# EAGLE board SparkFun_PIR_Breakout-Panel (EAGLE 9.6.0), part 1 of 3
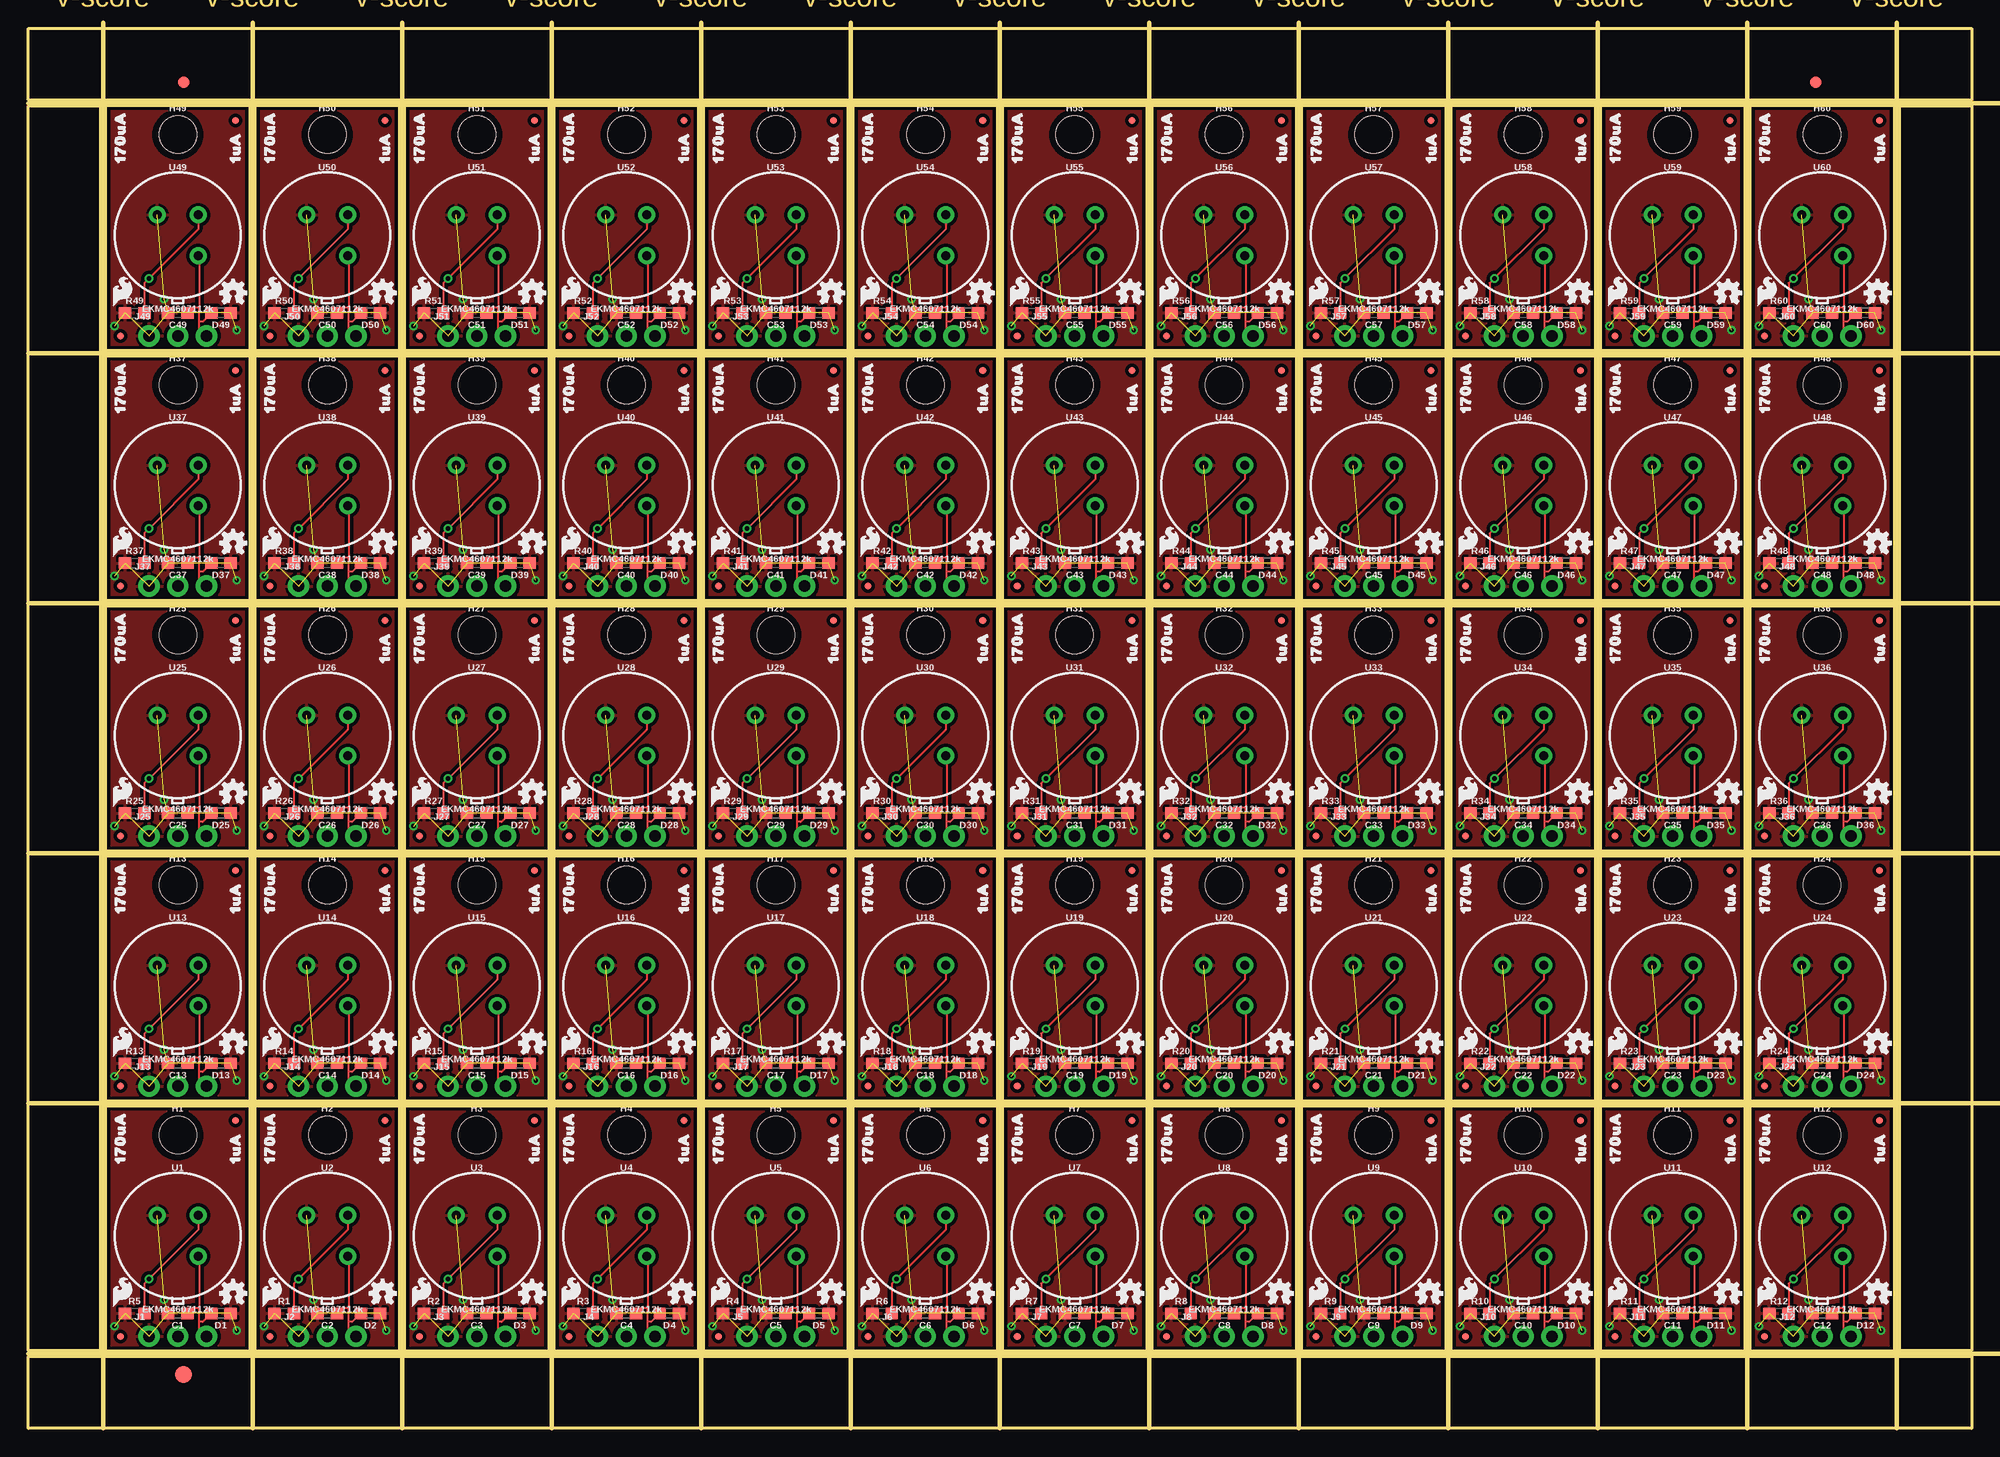
[diagram p0: board, top side]
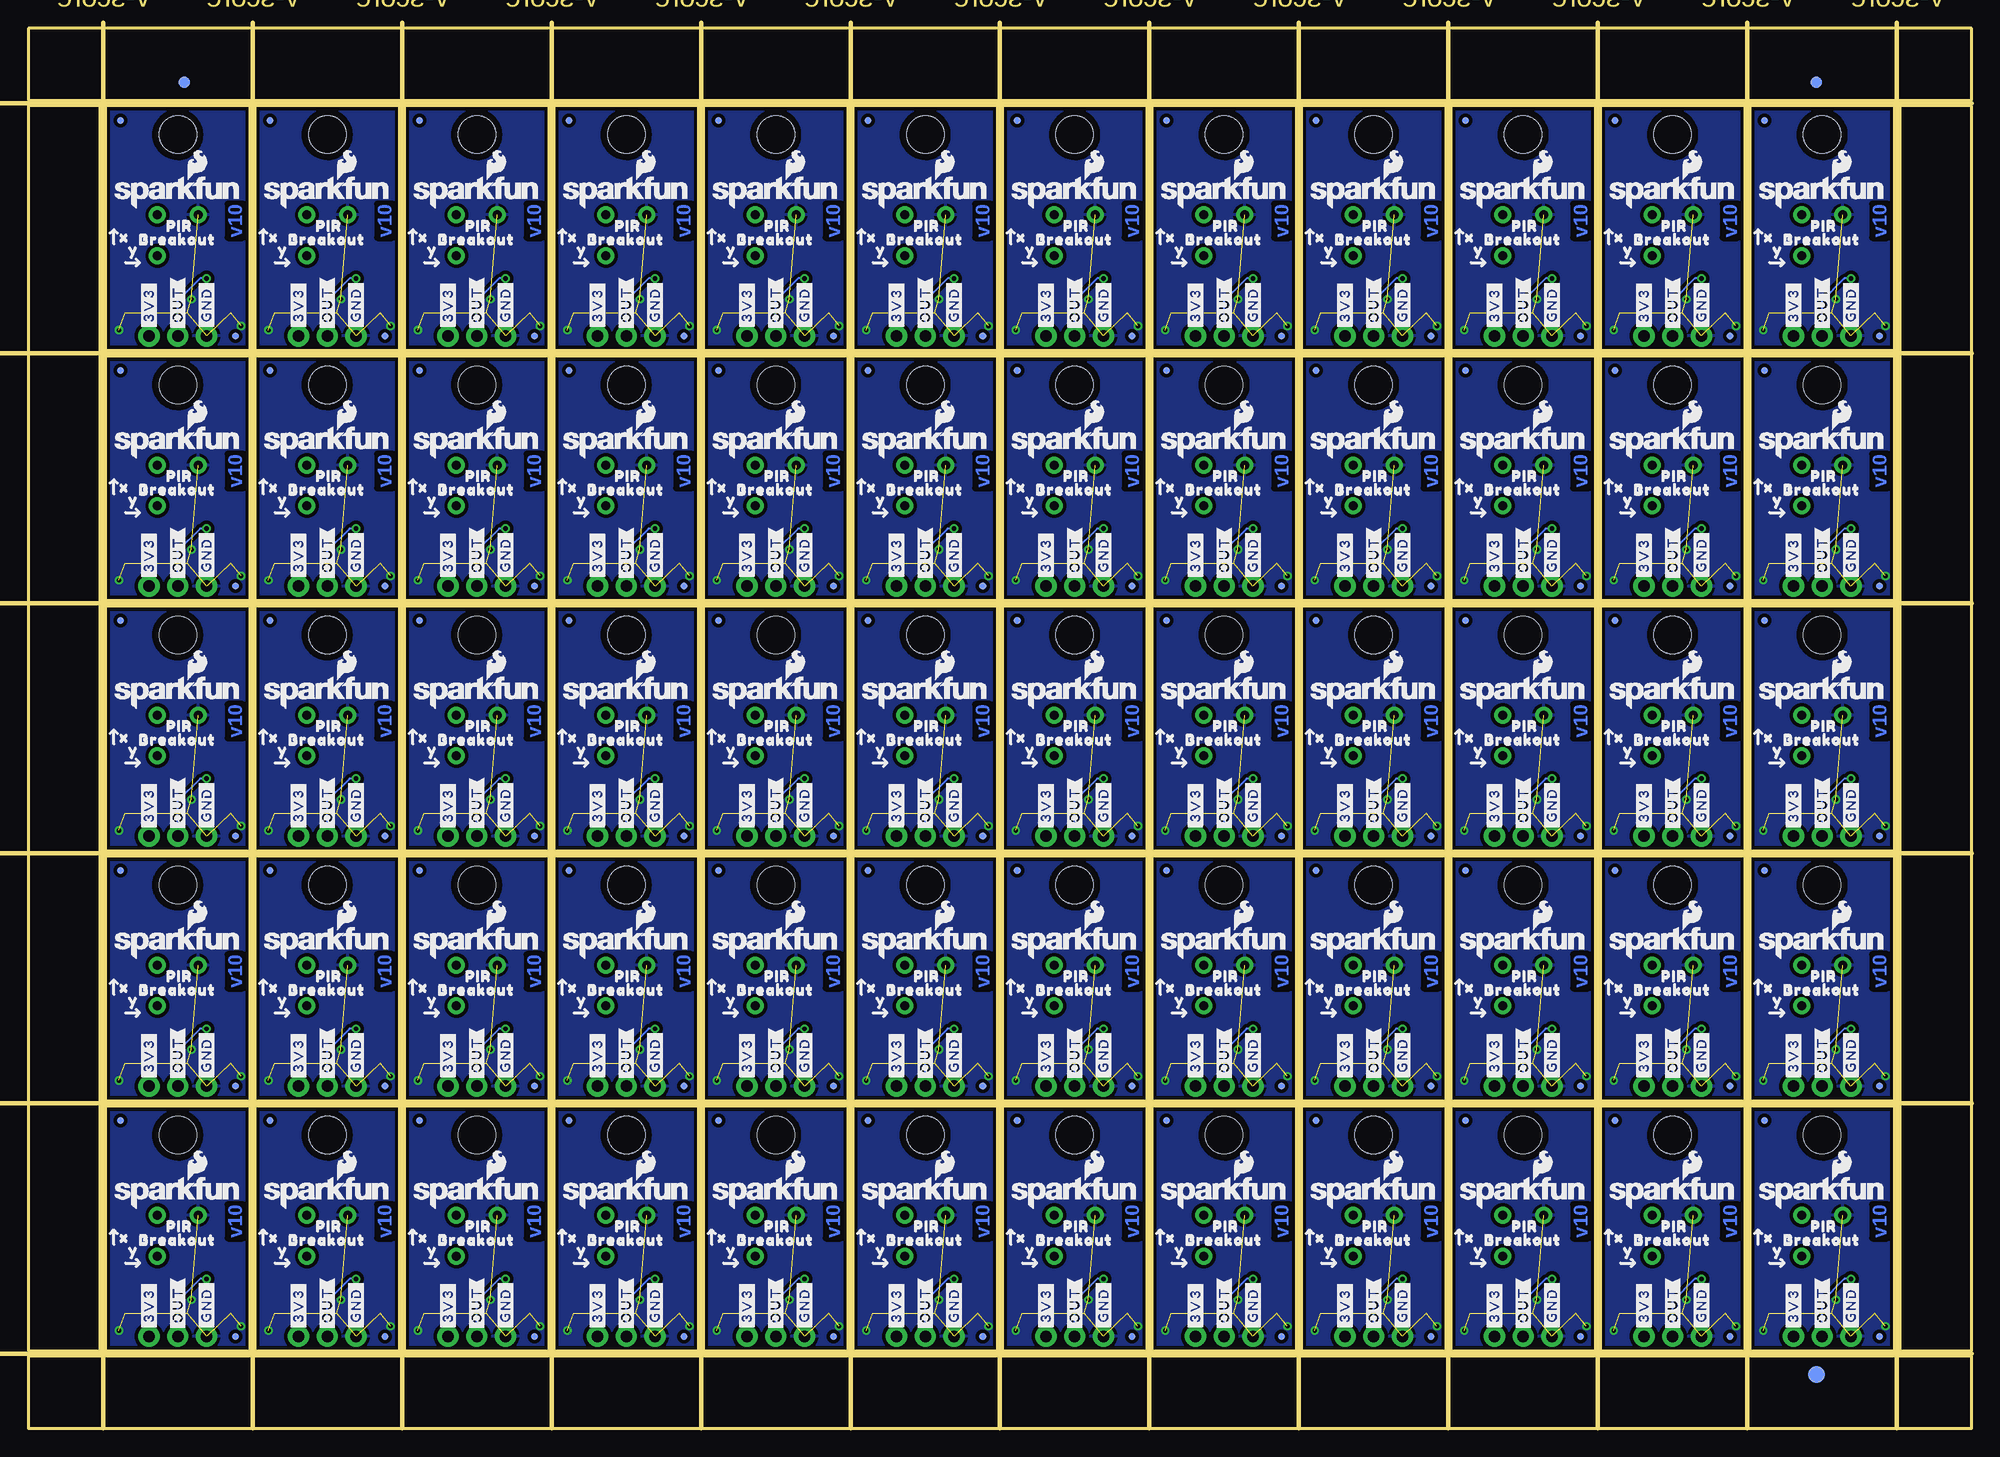
[diagram p1: board, bottom side, seen from below]

Size 171.7 x 123.7 mm. Coordinates in mm from the lower left corner, seen from the top.
Outline: 256 segments
Copper layers (1*16): Top 0.035mm / dielectric 1.5mm / Bottom 0.035mm
Design rules "SparkFun_PIR_Breakout": minimum track width 7mil, minimum drill 15mil, track to track 7mil, track to pad 7mil, pad to pad 7mil, via to via 7mil, smd to smd 7mil, copper to edge 7mil, drill to drill 7mil, minimum pad ring 7mil, minimum via ring 7mil, stop-mask expansion 4mil, vias tented up to drill 25mil, thermal gap 10mil
Milling: 19 lines

## Footprints (pad centres in the part's own frame; a part is rotated, then mirrored left to right if it is on the bottom)
0603 = smd 1.1 x 1: 1 -0.85,0; 2 0.85,0
FIDUCIAL-1X2 = smd 1 x 1: 1 0,0
FIDUCIAL-1.5X3 = smd 1.5 x 1.5: 1 0,0
STAND-OFF = hole 3.302: 0,0
1X03_NO_SILK = drill 1.016 pad 1.88: 1 0,0; 2 2.54,0; 3 5.08,0
MICRO-FIDUCIAL = smd 0.635 x 0.635: 1 0,0
TO-3 = drill 0.8 pad 1.5: GND -1.796,1.796; OUT 1.796,1.796; VDD 1.796,-1.796

## Placement (x,y rotation side)
C1  0.1uF  [0603]  13.21,10.16 180 top
C2  0.1uF  [0603]  26.42,10.16 180 top
C3  0.1uF  [0603]  39.62,10.16 180 top
C4  0.1uF  [0603]  52.83,10.16 180 top
C5  0.1uF  [0603]  66.04,10.16 180 top
C6  0.1uF  [0603]  79.25,10.16 180 top
C7  0.1uF  [0603]  92.46,10.16 180 top
C8  0.1uF  [0603]  105.66,10.16 180 top
C9  0.1uF  [0603]  118.87,10.16 180 top
C10  0.1uF  [0603]  132.08,10.16 180 top
C11  0.1uF  [0603]  145.29,10.16 180 top
C12  0.1uF  [0603]  158.5,10.16 180 top
C13  0.1uF  [0603]  13.21,32.26 180 top
C14  0.1uF  [0603]  26.42,32.26 180 top
C15  0.1uF  [0603]  39.62,32.26 180 top
C16  0.1uF  [0603]  52.83,32.26 180 top
C17  0.1uF  [0603]  66.04,32.26 180 top
C18  0.1uF  [0603]  79.25,32.26 180 top
C19  0.1uF  [0603]  92.46,32.26 180 top
C20  0.1uF  [0603]  105.66,32.26 180 top
C21  0.1uF  [0603]  118.87,32.26 180 top
C22  0.1uF  [0603]  132.08,32.26 180 top
C23  0.1uF  [0603]  145.29,32.26 180 top
C24  0.1uF  [0603]  158.5,32.26 180 top
C25  0.1uF  [0603]  13.21,54.36 180 top
C26  0.1uF  [0603]  26.42,54.36 180 top
C27  0.1uF  [0603]  39.62,54.36 180 top
C28  0.1uF  [0603]  52.83,54.36 180 top
C29  0.1uF  [0603]  66.04,54.36 180 top
C30  0.1uF  [0603]  79.25,54.36 180 top
C31  0.1uF  [0603]  92.46,54.36 180 top
C32  0.1uF  [0603]  105.66,54.36 180 top
C33  0.1uF  [0603]  118.87,54.36 180 top
C34  0.1uF  [0603]  132.08,54.36 180 top
C35  0.1uF  [0603]  145.29,54.36 180 top
C36  0.1uF  [0603]  158.5,54.36 180 top
C37  0.1uF  [0603]  13.21,76.45 180 top
C38  0.1uF  [0603]  26.42,76.45 180 top
C39  0.1uF  [0603]  39.62,76.45 180 top
C40  0.1uF  [0603]  52.83,76.45 180 top
C41  0.1uF  [0603]  66.04,76.45 180 top
C42  0.1uF  [0603]  79.25,76.45 180 top
C43  0.1uF  [0603]  92.46,76.45 180 top
C44  0.1uF  [0603]  105.66,76.45 180 top
C45  0.1uF  [0603]  118.87,76.45 180 top
C46  0.1uF  [0603]  132.08,76.45 180 top
C47  0.1uF  [0603]  145.29,76.45 180 top
C48  0.1uF  [0603]  158.5,76.45 180 top
C49  0.1uF  [0603]  13.21,98.55 180 top
C50  0.1uF  [0603]  26.42,98.55 180 top
C51  0.1uF  [0603]  39.62,98.55 180 top
C52  0.1uF  [0603]  52.83,98.55 180 top
C53  0.1uF  [0603]  66.04,98.55 180 top
C54  0.1uF  [0603]  79.25,98.55 180 top
C55  0.1uF  [0603]  92.46,98.55 180 top
C56  0.1uF  [0603]  105.66,98.55 180 top
C57  0.1uF  [0603]  118.87,98.55 180 top
C58  0.1uF  [0603]  132.08,98.55 180 top
C59  0.1uF  [0603]  145.29,98.55 180 top
C60  0.1uF  [0603]  158.5,98.55 180 top
D1  24V  [0603]  17.02,10.16 180 top
D2  24V  [0603]  30.23,10.16 180 top
D3  24V  [0603]  43.43,10.16 180 top
D4  24V  [0603]  56.64,10.16 180 top
D5  24V  [0603]  69.85,10.16 180 top
D6  24V  [0603]  83.06,10.16 180 top
D7  24V  [0603]  96.27,10.16 180 top
D8  24V  [0603]  109.47,10.16 180 top
D9  24V  [0603]  122.68,10.16 180 top
D10  24V  [0603]  135.89,10.16 180 top
D11  24V  [0603]  149.1,10.16 180 top
D12  24V  [0603]  162.31,10.16 180 top
D13  24V  [0603]  17.02,32.26 180 top
D14  24V  [0603]  30.23,32.26 180 top
D15  24V  [0603]  43.43,32.26 180 top
D16  24V  [0603]  56.64,32.26 180 top
D17  24V  [0603]  69.85,32.26 180 top
D18  24V  [0603]  83.06,32.26 180 top
D19  24V  [0603]  96.27,32.26 180 top
D20  24V  [0603]  109.47,32.26 180 top
D21  24V  [0603]  122.68,32.26 180 top
D22  24V  [0603]  135.89,32.26 180 top
D23  24V  [0603]  149.1,32.26 180 top
D24  24V  [0603]  162.31,32.26 180 top
D25  24V  [0603]  17.02,54.36 180 top
D26  24V  [0603]  30.23,54.36 180 top
D27  24V  [0603]  43.43,54.36 180 top
D28  24V  [0603]  56.64,54.36 180 top
D29  24V  [0603]  69.85,54.36 180 top
D30  24V  [0603]  83.06,54.36 180 top
D31  24V  [0603]  96.27,54.36 180 top
D32  24V  [0603]  109.47,54.36 180 top
D33  24V  [0603]  122.68,54.36 180 top
D34  24V  [0603]  135.89,54.36 180 top
D35  24V  [0603]  149.1,54.36 180 top
D36  24V  [0603]  162.31,54.36 180 top
D37  24V  [0603]  17.02,76.45 180 top
D38  24V  [0603]  30.23,76.45 180 top
D39  24V  [0603]  43.43,76.45 180 top
D40  24V  [0603]  56.64,76.45 180 top
D41  24V  [0603]  69.85,76.45 180 top
D42  24V  [0603]  83.06,76.45 180 top
D43  24V  [0603]  96.27,76.45 180 top
D44  24V  [0603]  109.47,76.45 180 top
D45  24V  [0603]  122.68,76.45 180 top
D46  24V  [0603]  135.89,76.45 180 top
D47  24V  [0603]  149.1,76.45 180 top
D48  24V  [0603]  162.31,76.45 180 top
D49  24V  [0603]  17.02,98.55 180 top
D50  24V  [0603]  30.23,98.55 180 top
D51  24V  [0603]  43.43,98.55 180 top
D52  24V  [0603]  56.64,98.55 180 top
D53  24V  [0603]  69.85,98.55 180 top
D54  24V  [0603]  83.06,98.55 180 top
D55  24V  [0603]  96.27,98.55 180 top
D56  24V  [0603]  109.47,98.55 180 top
D57  24V  [0603]  122.68,98.55 180 top
D58  24V  [0603]  135.89,98.55 180 top
D59  24V  [0603]  149.1,98.55 180 top
D60  24V  [0603]  162.31,98.55 180 top
E$1  [FIDUCIAL-1X2]  13.72,118.94 0 top
E$2  [FIDUCIAL-1X2]  13.72,118.94 0 bottom
E$3  [FIDUCIAL-1X2]  157.92,118.94 0 top
E$4  [FIDUCIAL-1X2]  157.92,118.94 0 bottom
E$5  [FIDUCIAL-1.5X3]  13.72,4.76 0 top
E$6  [FIDUCIAL-1.5X3]  13.72,4.76 0 bottom
H1  STAND-OFF  [STAND-OFF]  13.21,25.91 0 top
H2  STAND-OFF  [STAND-OFF]  26.42,25.91 0 top
H3  STAND-OFF  [STAND-OFF]  39.62,25.91 0 top
H4  STAND-OFF  [STAND-OFF]  52.83,25.91 0 top
H5  STAND-OFF  [STAND-OFF]  66.04,25.91 0 top
H6  STAND-OFF  [STAND-OFF]  79.25,25.91 0 top
H7  STAND-OFF  [STAND-OFF]  92.46,25.91 0 top
H8  STAND-OFF  [STAND-OFF]  105.66,25.91 0 top
H9  STAND-OFF  [STAND-OFF]  118.87,25.91 0 top
H10  STAND-OFF  [STAND-OFF]  132.08,25.91 0 top
H11  STAND-OFF  [STAND-OFF]  145.29,25.91 0 top
H12  STAND-OFF  [STAND-OFF]  158.5,25.91 0 top
H13  STAND-OFF  [STAND-OFF]  13.21,48.01 0 top
H14  STAND-OFF  [STAND-OFF]  26.42,48.01 0 top
H15  STAND-OFF  [STAND-OFF]  39.62,48.01 0 top
H16  STAND-OFF  [STAND-OFF]  52.83,48.01 0 top
H17  STAND-OFF  [STAND-OFF]  66.04,48.01 0 top
H18  STAND-OFF  [STAND-OFF]  79.25,48.01 0 top
H19  STAND-OFF  [STAND-OFF]  92.46,48.01 0 top
H20  STAND-OFF  [STAND-OFF]  105.66,48.01 0 top
H21  STAND-OFF  [STAND-OFF]  118.87,48.01 0 top
H22  STAND-OFF  [STAND-OFF]  132.08,48.01 0 top
H23  STAND-OFF  [STAND-OFF]  145.29,48.01 0 top
H24  STAND-OFF  [STAND-OFF]  158.5,48.01 0 top
H25  STAND-OFF  [STAND-OFF]  13.21,70.1 0 top
H26  STAND-OFF  [STAND-OFF]  26.42,70.1 0 top
H27  STAND-OFF  [STAND-OFF]  39.62,70.1 0 top
H28  STAND-OFF  [STAND-OFF]  52.83,70.1 0 top
H29  STAND-OFF  [STAND-OFF]  66.04,70.1 0 top
H30  STAND-OFF  [STAND-OFF]  79.25,70.1 0 top
H31  STAND-OFF  [STAND-OFF]  92.46,70.1 0 top
H32  STAND-OFF  [STAND-OFF]  105.66,70.1 0 top
H33  STAND-OFF  [STAND-OFF]  118.87,70.1 0 top
H34  STAND-OFF  [STAND-OFF]  132.08,70.1 0 top
H35  STAND-OFF  [STAND-OFF]  145.29,70.1 0 top
H36  STAND-OFF  [STAND-OFF]  158.5,70.1 0 top
H37  STAND-OFF  [STAND-OFF]  13.21,92.2 0 top
H38  STAND-OFF  [STAND-OFF]  26.42,92.2 0 top
H39  STAND-OFF  [STAND-OFF]  39.62,92.2 0 top
H40  STAND-OFF  [STAND-OFF]  52.83,92.2 0 top
H41  STAND-OFF  [STAND-OFF]  66.04,92.2 0 top
H42  STAND-OFF  [STAND-OFF]  79.25,92.2 0 top
H43  STAND-OFF  [STAND-OFF]  92.46,92.2 0 top
H44  STAND-OFF  [STAND-OFF]  105.66,92.2 0 top
H45  STAND-OFF  [STAND-OFF]  118.87,92.2 0 top
H46  STAND-OFF  [STAND-OFF]  132.08,92.2 0 top
H47  STAND-OFF  [STAND-OFF]  145.29,92.2 0 top
H48  STAND-OFF  [STAND-OFF]  158.5,92.2 0 top
H49  STAND-OFF  [STAND-OFF]  13.21,114.3 0 top
H50  STAND-OFF  [STAND-OFF]  26.42,114.3 0 top
H51  STAND-OFF  [STAND-OFF]  39.62,114.3 0 top
H52  STAND-OFF  [STAND-OFF]  52.83,114.3 0 top
H53  STAND-OFF  [STAND-OFF]  66.04,114.3 0 top
H54  STAND-OFF  [STAND-OFF]  79.25,114.3 0 top
H55  STAND-OFF  [STAND-OFF]  92.46,114.3 0 top
H56  STAND-OFF  [STAND-OFF]  105.66,114.3 0 top
H57  STAND-OFF  [STAND-OFF]  118.87,114.3 0 top
H58  STAND-OFF  [STAND-OFF]  132.08,114.3 0 top
H59  STAND-OFF  [STAND-OFF]  145.29,114.3 0 top
H60  STAND-OFF  [STAND-OFF]  158.5,114.3 0 top
J1  [1X03_NO_SILK]  10.67,8.13 0 top
J2  [1X03_NO_SILK]  23.88,8.13 0 top
J3  [1X03_NO_SILK]  37.08,8.13 0 top
J4  [1X03_NO_SILK]  50.29,8.13 0 top
J5  [1X03_NO_SILK]  63.5,8.13 0 top
J6  [1X03_NO_SILK]  76.71,8.13 0 top
J7  [1X03_NO_SILK]  89.92,8.13 0 top
J8  [1X03_NO_SILK]  103.12,8.13 0 top
J9  [1X03_NO_SILK]  116.33,8.13 0 top
J10  [1X03_NO_SILK]  129.54,8.13 0 top
J11  [1X03_NO_SILK]  142.75,8.13 0 top
J12  [1X03_NO_SILK]  155.96,8.13 0 top
J13  [1X03_NO_SILK]  10.67,30.23 0 top
J14  [1X03_NO_SILK]  23.88,30.23 0 top
J15  [1X03_NO_SILK]  37.08,30.23 0 top
J16  [1X03_NO_SILK]  50.29,30.23 0 top
J17  [1X03_NO_SILK]  63.5,30.23 0 top
J18  [1X03_NO_SILK]  76.71,30.23 0 top
J19  [1X03_NO_SILK]  89.92,30.23 0 top
J20  [1X03_NO_SILK]  103.12,30.23 0 top
J21  [1X03_NO_SILK]  116.33,30.23 0 top
J22  [1X03_NO_SILK]  129.54,30.23 0 top
J23  [1X03_NO_SILK]  142.75,30.23 0 top
J24  [1X03_NO_SILK]  155.96,30.23 0 top
J25  [1X03_NO_SILK]  10.67,52.32 0 top
J26  [1X03_NO_SILK]  23.88,52.32 0 top
J27  [1X03_NO_SILK]  37.08,52.32 0 top
J28  [1X03_NO_SILK]  50.29,52.32 0 top
J29  [1X03_NO_SILK]  63.5,52.32 0 top
J30  [1X03_NO_SILK]  76.71,52.32 0 top
J31  [1X03_NO_SILK]  89.92,52.32 0 top
J32  [1X03_NO_SILK]  103.12,52.32 0 top
J33  [1X03_NO_SILK]  116.33,52.32 0 top
J34  [1X03_NO_SILK]  129.54,52.32 0 top
J35  [1X03_NO_SILK]  142.75,52.32 0 top
J36  [1X03_NO_SILK]  155.96,52.32 0 top
J37  [1X03_NO_SILK]  10.67,74.42 0 top
J38  [1X03_NO_SILK]  23.88,74.42 0 top
J39  [1X03_NO_SILK]  37.08,74.42 0 top
J40  [1X03_NO_SILK]  50.29,74.42 0 top
J41  [1X03_NO_SILK]  63.5,74.42 0 top
J42  [1X03_NO_SILK]  76.71,74.42 0 top
J43  [1X03_NO_SILK]  89.92,74.42 0 top
J44  [1X03_NO_SILK]  103.12,74.42 0 top
J45  [1X03_NO_SILK]  116.33,74.42 0 top
J46  [1X03_NO_SILK]  129.54,74.42 0 top
J47  [1X03_NO_SILK]  142.75,74.42 0 top
J48  [1X03_NO_SILK]  155.96,74.42 0 top
J49  [1X03_NO_SILK]  10.67,96.52 0 top
J50  [1X03_NO_SILK]  23.88,96.52 0 top
J51  [1X03_NO_SILK]  37.08,96.52 0 top
J52  [1X03_NO_SILK]  50.29,96.52 0 top
J53  [1X03_NO_SILK]  63.5,96.52 0 top
J54  [1X03_NO_SILK]  76.71,96.52 0 top
J55  [1X03_NO_SILK]  89.92,96.52 0 top
J56  [1X03_NO_SILK]  103.12,96.52 0 top
J57  [1X03_NO_SILK]  116.33,96.52 0 top
J58  [1X03_NO_SILK]  129.54,96.52 0 top
J59  [1X03_NO_SILK]  142.75,96.52 0 top
J60  [1X03_NO_SILK]  155.96,96.52 0 top
JP1  FIDUCIALUFIDUCIAL  [MICRO-FIDUCIAL]  31.5,27.18 0 bottom
JP2  FIDUCIALUFIDUCIAL  [MICRO-FIDUCIAL]  18.29,27.18 0 bottom
JP3  FIDUCIALUFIDUCIAL  [MICRO-FIDUCIAL]  21.34,8.13 0 bottom
JP4  FIDUCIALUFIDUCIAL  [MICRO-FIDUCIAL]  21.34,8.13 0 top
JP5  FIDUCIALUFIDUCIAL  [MICRO-FIDUCIAL]  31.5,27.18 0 top
JP6  FIDUCIALUFIDUCIAL  [MICRO-FIDUCIAL]  8.13,8.13 0 bottom
JP7  FIDUCIALUFIDUCIAL  [MICRO-FIDUCIAL]  44.7,27.18 0 bottom
JP8  FIDUCIALUFIDUCIAL  [MICRO-FIDUCIAL]  8.13,8.13 0 top
JP9  FIDUCIALUFIDUCIAL  [MICRO-FIDUCIAL]  18.29,27.18 0 top
JP10  FIDUCIALUFIDUCIAL  [MICRO-FIDUCIAL]  34.54,8.13 0 bottom
JP11  FIDUCIALUFIDUCIAL  [MICRO-FIDUCIAL]  34.54,8.13 0 top
JP12  FIDUCIALUFIDUCIAL  [MICRO-FIDUCIAL]  44.7,27.18 0 top
JP13  FIDUCIALUFIDUCIAL  [MICRO-FIDUCIAL]  57.91,27.18 0 bottom
JP14  FIDUCIALUFIDUCIAL  [MICRO-FIDUCIAL]  47.75,8.13 0 bottom
JP15  FIDUCIALUFIDUCIAL  [MICRO-FIDUCIAL]  47.75,8.13 0 top
JP16  FIDUCIALUFIDUCIAL  [MICRO-FIDUCIAL]  57.91,27.18 0 top
JP17  FIDUCIALUFIDUCIAL  [MICRO-FIDUCIAL]  71.12,27.18 0 bottom
JP18  FIDUCIALUFIDUCIAL  [MICRO-FIDUCIAL]  60.96,8.13 0 bottom
JP19  FIDUCIALUFIDUCIAL  [MICRO-FIDUCIAL]  60.96,8.13 0 top
JP20  FIDUCIALUFIDUCIAL  [MICRO-FIDUCIAL]  71.12,27.18 0 top
JP21  FIDUCIALUFIDUCIAL  [MICRO-FIDUCIAL]  84.33,27.18 0 bottom
JP22  FIDUCIALUFIDUCIAL  [MICRO-FIDUCIAL]  74.17,8.13 0 bottom
JP23  FIDUCIALUFIDUCIAL  [MICRO-FIDUCIAL]  74.17,8.13 0 top
JP24  FIDUCIALUFIDUCIAL  [MICRO-FIDUCIAL]  84.33,27.18 0 top
JP25  FIDUCIALUFIDUCIAL  [MICRO-FIDUCIAL]  97.54,27.18 0 bottom
JP26  FIDUCIALUFIDUCIAL  [MICRO-FIDUCIAL]  87.38,8.13 0 bottom
JP27  FIDUCIALUFIDUCIAL  [MICRO-FIDUCIAL]  87.38,8.13 0 top
JP28  FIDUCIALUFIDUCIAL  [MICRO-FIDUCIAL]  97.54,27.18 0 top
JP29  FIDUCIALUFIDUCIAL  [MICRO-FIDUCIAL]  110.74,27.18 0 bottom
JP30  FIDUCIALUFIDUCIAL  [MICRO-FIDUCIAL]  100.58,8.13 0 bottom
JP31  FIDUCIALUFIDUCIAL  [MICRO-FIDUCIAL]  100.58,8.13 0 top
JP32  FIDUCIALUFIDUCIAL  [MICRO-FIDUCIAL]  110.74,27.18 0 top
JP33  FIDUCIALUFIDUCIAL  [MICRO-FIDUCIAL]  123.95,27.18 0 bottom
JP34  FIDUCIALUFIDUCIAL  [MICRO-FIDUCIAL]  113.79,8.13 0 bottom
JP35  FIDUCIALUFIDUCIAL  [MICRO-FIDUCIAL]  113.79,8.13 0 top
JP36  FIDUCIALUFIDUCIAL  [MICRO-FIDUCIAL]  123.95,27.18 0 top
JP37  FIDUCIALUFIDUCIAL  [MICRO-FIDUCIAL]  137.16,27.18 0 bottom
JP38  FIDUCIALUFIDUCIAL  [MICRO-FIDUCIAL]  127,8.13 0 bottom
JP39  FIDUCIALUFIDUCIAL  [MICRO-FIDUCIAL]  127,8.13 0 top
JP40  FIDUCIALUFIDUCIAL  [MICRO-FIDUCIAL]  137.16,27.18 0 top
JP41  FIDUCIALUFIDUCIAL  [MICRO-FIDUCIAL]  150.37,27.18 0 bottom
JP42  FIDUCIALUFIDUCIAL  [MICRO-FIDUCIAL]  140.21,8.13 0 bottom
JP43  FIDUCIALUFIDUCIAL  [MICRO-FIDUCIAL]  140.21,8.13 0 top
JP44  FIDUCIALUFIDUCIAL  [MICRO-FIDUCIAL]  150.37,27.18 0 top
JP45  FIDUCIALUFIDUCIAL  [MICRO-FIDUCIAL]  163.58,27.18 0 bottom
JP46  FIDUCIALUFIDUCIAL  [MICRO-FIDUCIAL]  153.42,8.13 0 bottom
JP47  FIDUCIALUFIDUCIAL  [MICRO-FIDUCIAL]  153.42,8.13 0 top
JP48  FIDUCIALUFIDUCIAL  [MICRO-FIDUCIAL]  163.58,27.18 0 top
JP49  FIDUCIALUFIDUCIAL  [MICRO-FIDUCIAL]  18.29,49.28 0 bottom
JP50  FIDUCIALUFIDUCIAL  [MICRO-FIDUCIAL]  8.13,30.23 0 bottom
JP51  FIDUCIALUFIDUCIAL  [MICRO-FIDUCIAL]  8.13,30.23 0 top
JP52  FIDUCIALUFIDUCIAL  [MICRO-FIDUCIAL]  18.29,49.28 0 top
JP53  FIDUCIALUFIDUCIAL  [MICRO-FIDUCIAL]  31.5,49.28 0 bottom
JP54  FIDUCIALUFIDUCIAL  [MICRO-FIDUCIAL]  21.34,30.23 0 bottom
JP55  FIDUCIALUFIDUCIAL  [MICRO-FIDUCIAL]  21.34,30.23 0 top
JP56  FIDUCIALUFIDUCIAL  [MICRO-FIDUCIAL]  31.5,49.28 0 top
JP57  FIDUCIALUFIDUCIAL  [MICRO-FIDUCIAL]  44.7,49.28 0 bottom
JP58  FIDUCIALUFIDUCIAL  [MICRO-FIDUCIAL]  34.54,30.23 0 bottom
JP59  FIDUCIALUFIDUCIAL  [MICRO-FIDUCIAL]  34.54,30.23 0 top
JP60  FIDUCIALUFIDUCIAL  [MICRO-FIDUCIAL]  44.7,49.28 0 top
JP61  FIDUCIALUFIDUCIAL  [MICRO-FIDUCIAL]  57.91,49.28 0 bottom
JP62  FIDUCIALUFIDUCIAL  [MICRO-FIDUCIAL]  47.75,30.23 0 bottom
JP63  FIDUCIALUFIDUCIAL  [MICRO-FIDUCIAL]  47.75,30.23 0 top
JP64  FIDUCIALUFIDUCIAL  [MICRO-FIDUCIAL]  57.91,49.28 0 top
JP65  FIDUCIALUFIDUCIAL  [MICRO-FIDUCIAL]  71.12,49.28 0 bottom
JP66  FIDUCIALUFIDUCIAL  [MICRO-FIDUCIAL]  60.96,30.23 0 bottom
JP67  FIDUCIALUFIDUCIAL  [MICRO-FIDUCIAL]  60.96,30.23 0 top
JP68  FIDUCIALUFIDUCIAL  [MICRO-FIDUCIAL]  71.12,49.28 0 top
JP69  FIDUCIALUFIDUCIAL  [MICRO-FIDUCIAL]  84.33,49.28 0 bottom
JP70  FIDUCIALUFIDUCIAL  [MICRO-FIDUCIAL]  74.17,30.23 0 bottom
JP71  FIDUCIALUFIDUCIAL  [MICRO-FIDUCIAL]  74.17,30.23 0 top
JP72  FIDUCIALUFIDUCIAL  [MICRO-FIDUCIAL]  84.33,49.28 0 top
JP73  FIDUCIALUFIDUCIAL  [MICRO-FIDUCIAL]  97.54,49.28 0 bottom
JP74  FIDUCIALUFIDUCIAL  [MICRO-FIDUCIAL]  87.38,30.23 0 bottom
JP75  FIDUCIALUFIDUCIAL  [MICRO-FIDUCIAL]  87.38,30.23 0 top
JP76  FIDUCIALUFIDUCIAL  [MICRO-FIDUCIAL]  97.54,49.28 0 top
JP77  FIDUCIALUFIDUCIAL  [MICRO-FIDUCIAL]  110.74,49.28 0 bottom
JP78  FIDUCIALUFIDUCIAL  [MICRO-FIDUCIAL]  100.58,30.23 0 bottom
JP79  FIDUCIALUFIDUCIAL  [MICRO-FIDUCIAL]  100.58,30.23 0 top
JP80  FIDUCIALUFIDUCIAL  [MICRO-FIDUCIAL]  110.74,49.28 0 top
JP81  FIDUCIALUFIDUCIAL  [MICRO-FIDUCIAL]  123.95,49.28 0 bottom
JP82  FIDUCIALUFIDUCIAL  [MICRO-FIDUCIAL]  113.79,30.23 0 bottom
JP83  FIDUCIALUFIDUCIAL  [MICRO-FIDUCIAL]  113.79,30.23 0 top
JP84  FIDUCIALUFIDUCIAL  [MICRO-FIDUCIAL]  123.95,49.28 0 top
JP85  FIDUCIALUFIDUCIAL  [MICRO-FIDUCIAL]  137.16,49.28 0 bottom
JP86  FIDUCIALUFIDUCIAL  [MICRO-FIDUCIAL]  127,30.23 0 bottom
JP87  FIDUCIALUFIDUCIAL  [MICRO-FIDUCIAL]  127,30.23 0 top
JP88  FIDUCIALUFIDUCIAL  [MICRO-FIDUCIAL]  137.16,49.28 0 top
JP89  FIDUCIALUFIDUCIAL  [MICRO-FIDUCIAL]  150.37,49.28 0 bottom
JP90  FIDUCIALUFIDUCIAL  [MICRO-FIDUCIAL]  140.21,30.23 0 bottom
JP91  FIDUCIALUFIDUCIAL  [MICRO-FIDUCIAL]  140.21,30.23 0 top
JP92  FIDUCIALUFIDUCIAL  [MICRO-FIDUCIAL]  150.37,49.28 0 top
JP93  FIDUCIALUFIDUCIAL  [MICRO-FIDUCIAL]  163.58,49.28 0 bottom
JP94  FIDUCIALUFIDUCIAL  [MICRO-FIDUCIAL]  153.42,30.23 0 bottom
JP95  FIDUCIALUFIDUCIAL  [MICRO-FIDUCIAL]  153.42,30.23 0 top
JP96  FIDUCIALUFIDUCIAL  [MICRO-FIDUCIAL]  163.58,49.28 0 top
JP97  FIDUCIALUFIDUCIAL  [MICRO-FIDUCIAL]  18.29,71.37 0 bottom
JP98  FIDUCIALUFIDUCIAL  [MICRO-FIDUCIAL]  8.13,52.32 0 bottom
JP99  FIDUCIALUFIDUCIAL  [MICRO-FIDUCIAL]  8.13,52.32 0 top
JP100  FIDUCIALUFIDUCIAL  [MICRO-FIDUCIAL]  18.29,71.37 0 top
JP101  FIDUCIALUFIDUCIAL  [MICRO-FIDUCIAL]  31.5,71.37 0 bottom
JP102  FIDUCIALUFIDUCIAL  [MICRO-FIDUCIAL]  21.34,52.32 0 bottom
JP103  FIDUCIALUFIDUCIAL  [MICRO-FIDUCIAL]  21.34,52.32 0 top
JP104  FIDUCIALUFIDUCIAL  [MICRO-FIDUCIAL]  31.5,71.37 0 top
JP105  FIDUCIALUFIDUCIAL  [MICRO-FIDUCIAL]  44.7,71.37 0 bottom
JP106  FIDUCIALUFIDUCIAL  [MICRO-FIDUCIAL]  34.54,52.32 0 bottom
JP107  FIDUCIALUFIDUCIAL  [MICRO-FIDUCIAL]  34.54,52.32 0 top
JP108  FIDUCIALUFIDUCIAL  [MICRO-FIDUCIAL]  44.7,71.37 0 top
JP109  FIDUCIALUFIDUCIAL  [MICRO-FIDUCIAL]  57.91,71.37 0 bottom
JP110  FIDUCIALUFIDUCIAL  [MICRO-FIDUCIAL]  47.75,52.32 0 bottom
JP111  FIDUCIALUFIDUCIAL  [MICRO-FIDUCIAL]  47.75,52.32 0 top
JP112  FIDUCIALUFIDUCIAL  [MICRO-FIDUCIAL]  57.91,71.37 0 top
JP113  FIDUCIALUFIDUCIAL  [MICRO-FIDUCIAL]  71.12,71.37 0 bottom
JP114  FIDUCIALUFIDUCIAL  [MICRO-FIDUCIAL]  60.96,52.32 0 bottom
JP115  FIDUCIALUFIDUCIAL  [MICRO-FIDUCIAL]  60.96,52.32 0 top
JP116  FIDUCIALUFIDUCIAL  [MICRO-FIDUCIAL]  71.12,71.37 0 top
JP117  FIDUCIALUFIDUCIAL  [MICRO-FIDUCIAL]  84.33,71.37 0 bottom
JP118  FIDUCIALUFIDUCIAL  [MICRO-FIDUCIAL]  74.17,52.32 0 bottom
JP119  FIDUCIALUFIDUCIAL  [MICRO-FIDUCIAL]  74.17,52.32 0 top
JP120  FIDUCIALUFIDUCIAL  [MICRO-FIDUCIAL]  84.33,71.37 0 top
JP121  FIDUCIALUFIDUCIAL  [MICRO-FIDUCIAL]  97.54,71.37 0 bottom
JP122  FIDUCIALUFIDUCIAL  [MICRO-FIDUCIAL]  87.38,52.32 0 bottom
JP123  FIDUCIALUFIDUCIAL  [MICRO-FIDUCIAL]  87.38,52.32 0 top
JP124  FIDUCIALUFIDUCIAL  [MICRO-FIDUCIAL]  97.54,71.37 0 top
JP125  FIDUCIALUFIDUCIAL  [MICRO-FIDUCIAL]  110.74,71.37 0 bottom
JP126  FIDUCIALUFIDUCIAL  [MICRO-FIDUCIAL]  100.58,52.32 0 bottom
JP127  FIDUCIALUFIDUCIAL  [MICRO-FIDUCIAL]  100.58,52.32 0 top
JP128  FIDUCIALUFIDUCIAL  [MICRO-FIDUCIAL]  110.74,71.37 0 top
JP129  FIDUCIALUFIDUCIAL  [MICRO-FIDUCIAL]  123.95,71.37 0 bottom
JP130  FIDUCIALUFIDUCIAL  [MICRO-FIDUCIAL]  113.79,52.32 0 bottom
JP131  FIDUCIALUFIDUCIAL  [MICRO-FIDUCIAL]  113.79,52.32 0 top
JP132  FIDUCIALUFIDUCIAL  [MICRO-FIDUCIAL]  123.95,71.37 0 top
JP133  FIDUCIALUFIDUCIAL  [MICRO-FIDUCIAL]  137.16,71.37 0 bottom
JP134  FIDUCIALUFIDUCIAL  [MICRO-FIDUCIAL]  127,52.32 0 bottom
JP135  FIDUCIALUFIDUCIAL  [MICRO-FIDUCIAL]  127,52.32 0 top
JP136  FIDUCIALUFIDUCIAL  [MICRO-FIDUCIAL]  137.16,71.37 0 top
JP137  FIDUCIALUFIDUCIAL  [MICRO-FIDUCIAL]  150.37,71.37 0 bottom
JP138  FIDUCIALUFIDUCIAL  [MICRO-FIDUCIAL]  140.21,52.32 0 bottom
JP139  FIDUCIALUFIDUCIAL  [MICRO-FIDUCIAL]  140.21,52.32 0 top
JP140  FIDUCIALUFIDUCIAL  [MICRO-FIDUCIAL]  150.37,71.37 0 top
JP141  FIDUCIALUFIDUCIAL  [MICRO-FIDUCIAL]  163.58,71.37 0 bottom
JP142  FIDUCIALUFIDUCIAL  [MICRO-FIDUCIAL]  153.42,52.32 0 bottom
JP143  FIDUCIALUFIDUCIAL  [MICRO-FIDUCIAL]  153.42,52.32 0 top
JP144  FIDUCIALUFIDUCIAL  [MICRO-FIDUCIAL]  163.58,71.37 0 top
JP145  FIDUCIALUFIDUCIAL  [MICRO-FIDUCIAL]  18.29,93.47 0 bottom
JP146  FIDUCIALUFIDUCIAL  [MICRO-FIDUCIAL]  8.13,74.42 0 bottom
JP147  FIDUCIALUFIDUCIAL  [MICRO-FIDUCIAL]  8.13,74.42 0 top
JP148  FIDUCIALUFIDUCIAL  [MICRO-FIDUCIAL]  18.29,93.47 0 top
JP149  FIDUCIALUFIDUCIAL  [MICRO-FIDUCIAL]  31.5,93.47 0 bottom
JP150  FIDUCIALUFIDUCIAL  [MICRO-FIDUCIAL]  21.34,74.42 0 bottom
JP151  FIDUCIALUFIDUCIAL  [MICRO-FIDUCIAL]  21.34,74.42 0 top
JP152  FIDUCIALUFIDUCIAL  [MICRO-FIDUCIAL]  31.5,93.47 0 top
JP153  FIDUCIALUFIDUCIAL  [MICRO-FIDUCIAL]  44.7,93.47 0 bottom
JP154  FIDUCIALUFIDUCIAL  [MICRO-FIDUCIAL]  34.54,74.42 0 bottom
JP155  FIDUCIALUFIDUCIAL  [MICRO-FIDUCIAL]  34.54,74.42 0 top
JP156  FIDUCIALUFIDUCIAL  [MICRO-FIDUCIAL]  44.7,93.47 0 top
JP157  FIDUCIALUFIDUCIAL  [MICRO-FIDUCIAL]  57.91,93.47 0 bottom
JP158  FIDUCIALUFIDUCIAL  [MICRO-FIDUCIAL]  47.75,74.42 0 bottom
JP159  FIDUCIALUFIDUCIAL  [MICRO-FIDUCIAL]  47.75,74.42 0 top
JP160  FIDUCIALUFIDUCIAL  [MICRO-FIDUCIAL]  57.91,93.47 0 top
JP161  FIDUCIALUFIDUCIAL  [MICRO-FIDUCIAL]  71.12,93.47 0 bottom
JP162  FIDUCIALUFIDUCIAL  [MICRO-FIDUCIAL]  60.96,74.42 0 bottom
JP163  FIDUCIALUFIDUCIAL  [MICRO-FIDUCIAL]  60.96,74.42 0 top
JP164  FIDUCIALUFIDUCIAL  [MICRO-FIDUCIAL]  71.12,93.47 0 top
JP165  FIDUCIALUFIDUCIAL  [MICRO-FIDUCIAL]  84.33,93.47 0 bottom
JP166  FIDUCIALUFIDUCIAL  [MICRO-FIDUCIAL]  74.17,74.42 0 bottom
JP167  FIDUCIALUFIDUCIAL  [MICRO-FIDUCIAL]  74.17,74.42 0 top
JP168  FIDUCIALUFIDUCIAL  [MICRO-FIDUCIAL]  84.33,93.47 0 top
JP169  FIDUCIALUFIDUCIAL  [MICRO-FIDUCIAL]  97.54,93.47 0 bottom
JP170  FIDUCIALUFIDUCIAL  [MICRO-FIDUCIAL]  87.38,74.42 0 bottom
JP171  FIDUCIALUFIDUCIAL  [MICRO-FIDUCIAL]  87.38,74.42 0 top
JP172  FIDUCIALUFIDUCIAL  [MICRO-FIDUCIAL]  97.54,93.47 0 top
JP173  FIDUCIALUFIDUCIAL  [MICRO-FIDUCIAL]  110.74,93.47 0 bottom
JP174  FIDUCIALUFIDUCIAL  [MICRO-FIDUCIAL]  100.58,74.42 0 bottom
JP175  FIDUCIALUFIDUCIAL  [MICRO-FIDUCIAL]  100.58,74.42 0 top
JP176  FIDUCIALUFIDUCIAL  [MICRO-FIDUCIAL]  110.74,93.47 0 top
JP177  FIDUCIALUFIDUCIAL  [MICRO-FIDUCIAL]  123.95,93.47 0 bottom
JP178  FIDUCIALUFIDUCIAL  [MICRO-FIDUCIAL]  113.79,74.42 0 bottom
JP179  FIDUCIALUFIDUCIAL  [MICRO-FIDUCIAL]  113.79,74.42 0 top
JP180  FIDUCIALUFIDUCIAL  [MICRO-FIDUCIAL]  123.95,93.47 0 top
JP181  FIDUCIALUFIDUCIAL  [MICRO-FIDUCIAL]  137.16,93.47 0 bottom
JP182  FIDUCIALUFIDUCIAL  [MICRO-FIDUCIAL]  127,74.42 0 bottom
JP183  FIDUCIALUFIDUCIAL  [MICRO-FIDUCIAL]  127,74.42 0 top
JP184  FIDUCIALUFIDUCIAL  [MICRO-FIDUCIAL]  137.16,93.47 0 top
JP185  FIDUCIALUFIDUCIAL  [MICRO-FIDUCIAL]  150.37,93.47 0 bottom
JP186  FIDUCIALUFIDUCIAL  [MICRO-FIDUCIAL]  140.21,74.42 0 bottom
JP187  FIDUCIALUFIDUCIAL  [MICRO-FIDUCIAL]  140.21,74.42 0 top
JP188  FIDUCIALUFIDUCIAL  [MICRO-FIDUCIAL]  150.37,93.47 0 top
JP189  FIDUCIALUFIDUCIAL  [MICRO-FIDUCIAL]  163.58,93.47 0 bottom
JP190  FIDUCIALUFIDUCIAL  [MICRO-FIDUCIAL]  153.42,74.42 0 bottom
JP191  FIDUCIALUFIDUCIAL  [MICRO-FIDUCIAL]  153.42,74.42 0 top
JP192  FIDUCIALUFIDUCIAL  [MICRO-FIDUCIAL]  163.58,93.47 0 top
JP193  FIDUCIALUFIDUCIAL  [MICRO-FIDUCIAL]  18.29,115.57 0 bottom
JP194  FIDUCIALUFIDUCIAL  [MICRO-FIDUCIAL]  8.13,96.52 0 bottom
JP195  FIDUCIALUFIDUCIAL  [MICRO-FIDUCIAL]  8.13,96.52 0 top
JP196  FIDUCIALUFIDUCIAL  [MICRO-FIDUCIAL]  18.29,115.57 0 top
JP197  FIDUCIALUFIDUCIAL  [MICRO-FIDUCIAL]  31.5,115.57 0 bottom
JP198  FIDUCIALUFIDUCIAL  [MICRO-FIDUCIAL]  21.34,96.52 0 bottom
JP199  FIDUCIALUFIDUCIAL  [MICRO-FIDUCIAL]  21.34,96.52 0 top
JP200  FIDUCIALUFIDUCIAL  [MICRO-FIDUCIAL]  31.5,115.57 0 top
JP201  FIDUCIALUFIDUCIAL  [MICRO-FIDUCIAL]  44.7,115.57 0 bottom
JP202  FIDUCIALUFIDUCIAL  [MICRO-FIDUCIAL]  34.54,96.52 0 bottom
JP203  FIDUCIALUFIDUCIAL  [MICRO-FIDUCIAL]  34.54,96.52 0 top
JP204  FIDUCIALUFIDUCIAL  [MICRO-FIDUCIAL]  44.7,115.57 0 top
JP205  FIDUCIALUFIDUCIAL  [MICRO-FIDUCIAL]  57.91,115.57 0 bottom
JP206  FIDUCIALUFIDUCIAL  [MICRO-FIDUCIAL]  47.75,96.52 0 bottom
JP207  FIDUCIALUFIDUCIAL  [MICRO-FIDUCIAL]  47.75,96.52 0 top
JP208  FIDUCIALUFIDUCIAL  [MICRO-FIDUCIAL]  57.91,115.57 0 top
JP209  FIDUCIALUFIDUCIAL  [MICRO-FIDUCIAL]  71.12,115.57 0 bottom
JP210  FIDUCIALUFIDUCIAL  [MICRO-FIDUCIAL]  60.96,96.52 0 bottom
JP211  FIDUCIALUFIDUCIAL  [MICRO-FIDUCIAL]  60.96,96.52 0 top
JP212  FIDUCIALUFIDUCIAL  [MICRO-FIDUCIAL]  71.12,115.57 0 top
JP213  FIDUCIALUFIDUCIAL  [MICRO-FIDUCIAL]  84.33,115.57 0 bottom
JP214  FIDUCIALUFIDUCIAL  [MICRO-FIDUCIAL]  74.17,96.52 0 bottom
JP215  FIDUCIALUFIDUCIAL  [MICRO-FIDUCIAL]  74.17,96.52 0 top
JP216  FIDUCIALUFIDUCIAL  [MICRO-FIDUCIAL]  84.33,115.57 0 top
JP217  FIDUCIALUFIDUCIAL  [MICRO-FIDUCIAL]  97.54,115.57 0 bottom
JP218  FIDUCIALUFIDUCIAL  [MICRO-FIDUCIAL]  87.38,96.52 0 bottom
JP219  FIDUCIALUFIDUCIAL  [MICRO-FIDUCIAL]  87.38,96.52 0 top
JP220  FIDUCIALUFIDUCIAL  [MICRO-FIDUCIAL]  97.54,115.57 0 top
JP221  FIDUCIALUFIDUCIAL  [MICRO-FIDUCIAL]  110.74,115.57 0 bottom
JP222  FIDUCIALUFIDUCIAL  [MICRO-FIDUCIAL]  100.58,96.52 0 bottom
JP223  FIDUCIALUFIDUCIAL  [MICRO-FIDUCIAL]  100.58,96.52 0 top
JP224  FIDUCIALUFIDUCIAL  [MICRO-FIDUCIAL]  110.74,115.57 0 top
JP225  FIDUCIALUFIDUCIAL  [MICRO-FIDUCIAL]  123.95,115.57 0 bottom
JP226  FIDUCIALUFIDUCIAL  [MICRO-FIDUCIAL]  113.79,96.52 0 bottom
JP227  FIDUCIALUFIDUCIAL  [MICRO-FIDUCIAL]  113.79,96.52 0 top
JP228  FIDUCIALUFIDUCIAL  [MICRO-FIDUCIAL]  123.95,115.57 0 top
JP229  FIDUCIALUFIDUCIAL  [MICRO-FIDUCIAL]  137.16,115.57 0 bottom
JP230  FIDUCIALUFIDUCIAL  [MICRO-FIDUCIAL]  127,96.52 0 bottom
JP231  FIDUCIALUFIDUCIAL  [MICRO-FIDUCIAL]  127,96.52 0 top
JP232  FIDUCIALUFIDUCIAL  [MICRO-FIDUCIAL]  137.16,115.57 0 top
JP233  FIDUCIALUFIDUCIAL  [MICRO-FIDUCIAL]  150.37,115.57 0 bottom
JP234  FIDUCIALUFIDUCIAL  [MICRO-FIDUCIAL]  140.21,96.52 0 bottom
JP235  FIDUCIALUFIDUCIAL  [MICRO-FIDUCIAL]  140.21,96.52 0 top
JP236  FIDUCIALUFIDUCIAL  [MICRO-FIDUCIAL]  150.37,115.57 0 top
JP237  FIDUCIALUFIDUCIAL  [MICRO-FIDUCIAL]  163.58,115.57 0 bottom
JP238  FIDUCIALUFIDUCIAL  [MICRO-FIDUCIAL]  153.42,96.52 0 bottom
JP239  FIDUCIALUFIDUCIAL  [MICRO-FIDUCIAL]  153.42,96.52 0 top
JP240  FIDUCIALUFIDUCIAL  [MICRO-FIDUCIAL]  163.58,115.57 0 top
LOGO1  OSHW-LOGOMINI  [OSHW-LOGO-MINI]  18.1,11.94 0 top
LOGO2  OSHW-LOGOMINI  [OSHW-LOGO-MINI]  31.31,11.94 0 top
LOGO3  SFE_LOGO_NAME_FLAME.1_INCH  [SFE_LOGO_NAME_FLAME_.1]  13.21,20.83 0 bottom
LOGO4  SFE_LOGO_FLAME.1_INCH  [SFE_LOGO_FLAME_.1]  8.32,12.06 0 top
LOGO5  SFE_LOGO_NAME_FLAME.1_INCH  [SFE_LOGO_NAME_FLAME_.1]  26.42,20.83 0 bottom
LOGO6  SFE_LOGO_FLAME.1_INCH  [SFE_LOGO_FLAME_.1]  21.53,12.06 0 top
LOGO7  OSHW-LOGOMINI  [OSHW-LOGO-MINI]  44.51,11.94 0 top
LOGO8  SFE_LOGO_NAME_FLAME.1_INCH  [SFE_LOGO_NAME_FLAME_.1]  39.62,20.83 0 bottom
LOGO9  SFE_LOGO_FLAME.1_INCH  [SFE_LOGO_FLAME_.1]  34.73,12.06 0 top
LOGO10  OSHW-LOGOMINI  [OSHW-LOGO-MINI]  57.72,11.94 0 top
LOGO11  SFE_LOGO_NAME_FLAME.1_INCH  [SFE_LOGO_NAME_FLAME_.1]  52.83,20.83 0 bottom
LOGO12  SFE_LOGO_FLAME.1_INCH  [SFE_LOGO_FLAME_.1]  47.94,12.06 0 top
LOGO13  OSHW-LOGOMINI  [OSHW-LOGO-MINI]  70.93,11.94 0 top
LOGO14  SFE_LOGO_NAME_FLAME.1_INCH  [SFE_LOGO_NAME_FLAME_.1]  66.04,20.83 0 bottom
LOGO15  SFE_LOGO_FLAME.1_INCH  [SFE_LOGO_FLAME_.1]  61.15,12.06 0 top
LOGO16  OSHW-LOGOMINI  [OSHW-LOGO-MINI]  84.14,11.94 0 top
LOGO17  SFE_LOGO_NAME_FLAME.1_INCH  [SFE_LOGO_NAME_FLAME_.1]  79.25,20.83 0 bottom
LOGO18  SFE_LOGO_FLAME.1_INCH  [SFE_LOGO_FLAME_.1]  74.36,12.06 0 top
LOGO19  OSHW-LOGOMINI  [OSHW-LOGO-MINI]  97.35,11.94 0 top
LOGO20  SFE_LOGO_NAME_FLAME.1_INCH  [SFE_LOGO_NAME_FLAME_.1]  92.46,20.83 0 bottom
LOGO21  SFE_LOGO_FLAME.1_INCH  [SFE_LOGO_FLAME_.1]  87.57,12.06 0 top
LOGO22  OSHW-LOGOMINI  [OSHW-LOGO-MINI]  110.55,11.94 0 top
LOGO23  SFE_LOGO_NAME_FLAME.1_INCH  [SFE_LOGO_NAME_FLAME_.1]  105.66,20.83 0 bottom
LOGO24  SFE_LOGO_FLAME.1_INCH  [SFE_LOGO_FLAME_.1]  100.77,12.06 0 top
LOGO25  OSHW-LOGOMINI  [OSHW-LOGO-MINI]  123.76,11.94 0 top
LOGO26  SFE_LOGO_NAME_FLAME.1_INCH  [SFE_LOGO_NAME_FLAME_.1]  118.87,20.83 0 bottom
LOGO27  SFE_LOGO_FLAME.1_INCH  [SFE_LOGO_FLAME_.1]  113.98,12.06 0 top
LOGO28  OSHW-LOGOMINI  [OSHW-LOGO-MINI]  136.97,11.94 0 top
LOGO29  SFE_LOGO_NAME_FLAME.1_INCH  [SFE_LOGO_NAME_FLAME_.1]  132.08,20.83 0 bottom
LOGO30  SFE_LOGO_FLAME.1_INCH  [SFE_LOGO_FLAME_.1]  127.19,12.06 0 top
LOGO31  OSHW-LOGOMINI  [OSHW-LOGO-MINI]  150.18,11.94 0 top
LOGO32  SFE_LOGO_NAME_FLAME.1_INCH  [SFE_LOGO_NAME_FLAME_.1]  145.29,20.83 0 bottom
LOGO33  SFE_LOGO_FLAME.1_INCH  [SFE_LOGO_FLAME_.1]  140.4,12.06 0 top
LOGO34  OSHW-LOGOMINI  [OSHW-LOGO-MINI]  163.39,11.94 0 top
LOGO35  SFE_LOGO_NAME_FLAME.1_INCH  [SFE_LOGO_NAME_FLAME_.1]  158.5,20.83 0 bottom
LOGO36  SFE_LOGO_FLAME.1_INCH  [SFE_LOGO_FLAME_.1]  153.61,12.06 0 top
LOGO37  OSHW-LOGOMINI  [OSHW-LOGO-MINI]  18.1,34.04 0 top
LOGO38  SFE_LOGO_NAME_FLAME.1_INCH  [SFE_LOGO_NAME_FLAME_.1]  13.21,42.93 0 bottom
LOGO39  SFE_LOGO_FLAME.1_INCH  [SFE_LOGO_FLAME_.1]  8.32,34.16 0 top
LOGO40  OSHW-LOGOMINI  [OSHW-LOGO-MINI]  31.31,34.04 0 top
LOGO41  SFE_LOGO_NAME_FLAME.1_INCH  [SFE_LOGO_NAME_FLAME_.1]  26.42,42.93 0 bottom
LOGO42  SFE_LOGO_FLAME.1_INCH  [SFE_LOGO_FLAME_.1]  21.53,34.16 0 top
LOGO43  OSHW-LOGOMINI  [OSHW-LOGO-MINI]  44.51,34.04 0 top
LOGO44  SFE_LOGO_NAME_FLAME.1_INCH  [SFE_LOGO_NAME_FLAME_.1]  39.62,42.93 0 bottom
LOGO45  SFE_LOGO_FLAME.1_INCH  [SFE_LOGO_FLAME_.1]  34.73,34.16 0 top
LOGO46  OSHW-LOGOMINI  [OSHW-LOGO-MINI]  57.72,34.04 0 top
LOGO47  SFE_LOGO_NAME_FLAME.1_INCH  [SFE_LOGO_NAME_FLAME_.1]  52.83,42.93 0 bottom
LOGO48  SFE_LOGO_FLAME.1_INCH  [SFE_LOGO_FLAME_.1]  47.94,34.16 0 top
LOGO49  OSHW-LOGOMINI  [OSHW-LOGO-MINI]  70.93,34.04 0 top
LOGO50  SFE_LOGO_NAME_FLAME.1_INCH  [SFE_LOGO_NAME_FLAME_.1]  66.04,42.93 0 bottom
LOGO51  SFE_LOGO_FLAME.1_INCH  [SFE_LOGO_FLAME_.1]  61.15,34.16 0 top
LOGO52  OSHW-LOGOMINI  [OSHW-LOGO-MINI]  84.14,34.04 0 top
LOGO53  SFE_LOGO_NAME_FLAME.1_INCH  [SFE_LOGO_NAME_FLAME_.1]  79.25,42.93 0 bottom
LOGO54  SFE_LOGO_FLAME.1_INCH  [SFE_LOGO_FLAME_.1]  74.36,34.16 0 top
LOGO55  OSHW-LOGOMINI  [OSHW-LOGO-MINI]  97.35,34.04 0 top
LOGO56  SFE_LOGO_NAME_FLAME.1_INCH  [SFE_LOGO_NAME_FLAME_.1]  92.46,42.93 0 bottom
LOGO57  SFE_LOGO_FLAME.1_INCH  [SFE_LOGO_FLAME_.1]  87.57,34.16 0 top
LOGO58  OSHW-LOGOMINI  [OSHW-LOGO-MINI]  110.55,34.04 0 top
LOGO59  SFE_LOGO_NAME_FLAME.1_INCH  [SFE_LOGO_NAME_FLAME_.1]  105.66,42.93 0 bottom
LOGO60  SFE_LOGO_FLAME.1_INCH  [SFE_LOGO_FLAME_.1]  100.77,34.16 0 top
LOGO61  OSHW-LOGOMINI  [OSHW-LOGO-MINI]  123.76,34.04 0 top
LOGO62  SFE_LOGO_NAME_FLAME.1_INCH  [SFE_LOGO_NAME_FLAME_.1]  118.87,42.93 0 bottom
LOGO63  SFE_LOGO_FLAME.1_INCH  [SFE_LOGO_FLAME_.1]  113.98,34.16 0 top
LOGO64  OSHW-LOGOMINI  [OSHW-LOGO-MINI]  136.97,34.04 0 top
LOGO65  SFE_LOGO_NAME_FLAME.1_INCH  [SFE_LOGO_NAME_FLAME_.1]  132.08,42.93 0 bottom
LOGO66  SFE_LOGO_FLAME.1_INCH  [SFE_LOGO_FLAME_.1]  127.19,34.16 0 top
LOGO67  OSHW-LOGOMINI  [OSHW-LOGO-MINI]  150.18,34.04 0 top
LOGO68  SFE_LOGO_NAME_FLAME.1_INCH  [SFE_LOGO_NAME_FLAME_.1]  145.29,42.93 0 bottom
LOGO69  SFE_LOGO_FLAME.1_INCH  [SFE_LOGO_FLAME_.1]  140.4,34.16 0 top
LOGO70  OSHW-LOGOMINI  [OSHW-LOGO-MINI]  163.39,34.04 0 top
LOGO71  SFE_LOGO_NAME_FLAME.1_INCH  [SFE_LOGO_NAME_FLAME_.1]  158.5,42.93 0 bottom
LOGO72  SFE_LOGO_FLAME.1_INCH  [SFE_LOGO_FLAME_.1]  153.61,34.16 0 top
LOGO73  OSHW-LOGOMINI  [OSHW-LOGO-MINI]  18.1,56.13 0 top
LOGO74  SFE_LOGO_NAME_FLAME.1_INCH  [SFE_LOGO_NAME_FLAME_.1]  13.21,65.02 0 bottom
LOGO75  SFE_LOGO_FLAME.1_INCH  [SFE_LOGO_FLAME_.1]  8.32,56.26 0 top
LOGO76  OSHW-LOGOMINI  [OSHW-LOGO-MINI]  31.31,56.13 0 top
LOGO77  SFE_LOGO_NAME_FLAME.1_INCH  [SFE_LOGO_NAME_FLAME_.1]  26.42,65.02 0 bottom
LOGO78  SFE_LOGO_FLAME.1_INCH  [SFE_LOGO_FLAME_.1]  21.53,56.26 0 top
LOGO79  OSHW-LOGOMINI  [OSHW-LOGO-MINI]  44.51,56.13 0 top
LOGO80  SFE_LOGO_NAME_FLAME.1_INCH  [SFE_LOGO_NAME_FLAME_.1]  39.62,65.02 0 bottom
LOGO81  SFE_LOGO_FLAME.1_INCH  [SFE_LOGO_FLAME_.1]  34.73,56.26 0 top
LOGO82  OSHW-LOGOMINI  [OSHW-LOGO-MINI]  57.72,56.13 0 top
LOGO83  SFE_LOGO_NAME_FLAME.1_INCH  [SFE_LOGO_NAME_FLAME_.1]  52.83,65.02 0 bottom
LOGO84  SFE_LOGO_FLAME.1_INCH  [SFE_LOGO_FLAME_.1]  47.94,56.26 0 top
LOGO85  OSHW-LOGOMINI  [OSHW-LOGO-MINI]  70.93,56.13 0 top
LOGO86  SFE_LOGO_NAME_FLAME.1_INCH  [SFE_LOGO_NAME_FLAME_.1]  66.04,65.02 0 bottom
LOGO87  SFE_LOGO_FLAME.1_INCH  [SFE_LOGO_FLAME_.1]  61.15,56.26 0 top
LOGO88  OSHW-LOGOMINI  [OSHW-LOGO-MINI]  84.14,56.13 0 top
LOGO89  SFE_LOGO_NAME_FLAME.1_INCH  [SFE_LOGO_NAME_FLAME_.1]  79.25,65.02 0 bottom
LOGO90  SFE_LOGO_FLAME.1_INCH  [SFE_LOGO_FLAME_.1]  74.36,56.26 0 top
LOGO91  OSHW-LOGOMINI  [OSHW-LOGO-MINI]  97.35,56.13 0 top
LOGO92  SFE_LOGO_NAME_FLAME.1_INCH  [SFE_LOGO_NAME_FLAME_.1]  92.46,65.02 0 bottom
LOGO93  SFE_LOGO_FLAME.1_INCH  [SFE_LOGO_FLAME_.1]  87.57,56.26 0 top
LOGO94  OSHW-LOGOMINI  [OSHW-LOGO-MINI]  110.55,56.13 0 top
LOGO95  SFE_LOGO_NAME_FLAME.1_INCH  [SFE_LOGO_NAME_FLAME_.1]  105.66,65.02 0 bottom
LOGO96  SFE_LOGO_FLAME.1_INCH  [SFE_LOGO_FLAME_.1]  100.77,56.26 0 top
LOGO97  OSHW-LOGOMINI  [OSHW-LOGO-MINI]  123.76,56.13 0 top
LOGO98  SFE_LOGO_NAME_FLAME.1_INCH  [SFE_LOGO_NAME_FLAME_.1]  118.87,65.02 0 bottom
LOGO99  SFE_LOGO_FLAME.1_INCH  [SFE_LOGO_FLAME_.1]  113.98,56.26 0 top
LOGO100  OSHW-LOGOMINI  [OSHW-LOGO-MINI]  136.97,56.13 0 top
LOGO101  SFE_LOGO_NAME_FLAME.1_INCH  [SFE_LOGO_NAME_FLAME_.1]  132.08,65.02 0 bottom
LOGO102  SFE_LOGO_FLAME.1_INCH  [SFE_LOGO_FLAME_.1]  127.19,56.26 0 top
LOGO103  OSHW-LOGOMINI  [OSHW-LOGO-MINI]  150.18,56.13 0 top
LOGO104  SFE_LOGO_NAME_FLAME.1_INCH  [SFE_LOGO_NAME_FLAME_.1]  145.29,65.02 0 bottom
LOGO105  SFE_LOGO_FLAME.1_INCH  [SFE_LOGO_FLAME_.1]  140.4,56.26 0 top
LOGO106  OSHW-LOGOMINI  [OSHW-LOGO-MINI]  163.39,56.13 0 top
LOGO107  SFE_LOGO_NAME_FLAME.1_INCH  [SFE_LOGO_NAME_FLAME_.1]  158.5,65.02 0 bottom
LOGO108  SFE_LOGO_FLAME.1_INCH  [SFE_LOGO_FLAME_.1]  153.61,56.26 0 top
LOGO109  OSHW-LOGOMINI  [OSHW-LOGO-MINI]  18.1,78.23 0 top
LOGO110  SFE_LOGO_NAME_FLAME.1_INCH  [SFE_LOGO_NAME_FLAME_.1]  13.21,87.12 0 bottom
LOGO111  SFE_LOGO_FLAME.1_INCH  [SFE_LOGO_FLAME_.1]  8.32,78.36 0 top
LOGO112  OSHW-LOGOMINI  [OSHW-LOGO-MINI]  31.31,78.23 0 top
LOGO113  SFE_LOGO_NAME_FLAME.1_INCH  [SFE_LOGO_NAME_FLAME_.1]  26.42,87.12 0 bottom
LOGO114  SFE_LOGO_FLAME.1_INCH  [SFE_LOGO_FLAME_.1]  21.53,78.36 0 top
LOGO115  OSHW-LOGOMINI  [OSHW-LOGO-MINI]  44.51,78.23 0 top
LOGO116  SFE_LOGO_NAME_FLAME.1_INCH  [SFE_LOGO_NAME_FLAME_.1]  39.62,87.12 0 bottom
LOGO117  SFE_LOGO_FLAME.1_INCH  [SFE_LOGO_FLAME_.1]  34.73,78.36 0 top
LOGO118  OSHW-LOGOMINI  [OSHW-LOGO-MINI]  57.72,78.23 0 top
LOGO119  SFE_LOGO_NAME_FLAME.1_INCH  [SFE_LOGO_NAME_FLAME_.1]  52.83,87.12 0 bottom
LOGO120  SFE_LOGO_FLAME.1_INCH  [SFE_LOGO_FLAME_.1]  47.94,78.36 0 top
LOGO121  OSHW-LOGOMINI  [OSHW-LOGO-MINI]  70.93,78.23 0 top
LOGO122  SFE_LOGO_NAME_FLAME.1_INCH  [SFE_LOGO_NAME_FLAME_.1]  66.04,87.12 0 bottom
LOGO123  SFE_LOGO_FLAME.1_INCH  [SFE_LOGO_FLAME_.1]  61.15,78.36 0 top
LOGO124  OSHW-LOGOMINI  [OSHW-LOGO-MINI]  84.14,78.23 0 top
LOGO125  SFE_LOGO_NAME_FLAME.1_INCH  [SFE_LOGO_NAME_FLAME_.1]  79.25,87.12 0 bottom
LOGO126  SFE_LOGO_FLAME.1_INCH  [SFE_LOGO_FLAME_.1]  74.36,78.36 0 top
LOGO127  OSHW-LOGOMINI  [OSHW-LOGO-MINI]  97.35,78.23 0 top
LOGO128  SFE_LOGO_NAME_FLAME.1_INCH  [SFE_LOGO_NAME_FLAME_.1]  92.46,87.12 0 bottom
LOGO129  SFE_LOGO_FLAME.1_INCH  [SFE_LOGO_FLAME_.1]  87.57,78.36 0 top
LOGO130  OSHW-LOGOMINI  [OSHW-LOGO-MINI]  110.55,78.23 0 top
LOGO131  SFE_LOGO_NAME_FLAME.1_INCH  [SFE_LOGO_NAME_FLAME_.1]  105.66,87.12 0 bottom
LOGO132  SFE_LOGO_FLAME.1_INCH  [SFE_LOGO_FLAME_.1]  100.77,78.36 0 top
LOGO133  OSHW-LOGOMINI  [OSHW-LOGO-MINI]  123.76,78.23 0 top
LOGO134  SFE_LOGO_NAME_FLAME.1_INCH  [SFE_LOGO_NAME_FLAME_.1]  118.87,87.12 0 bottom
LOGO135  SFE_LOGO_FLAME.1_INCH  [SFE_LOGO_FLAME_.1]  113.98,78.36 0 top
LOGO136  OSHW-LOGOMINI  [OSHW-LOGO-MINI]  136.97,78.23 0 top
LOGO137  SFE_LOGO_NAME_FLAME.1_INCH  [SFE_LOGO_NAME_FLAME_.1]  132.08,87.12 0 bottom
LOGO138  SFE_LOGO_FLAME.1_INCH  [SFE_LOGO_FLAME_.1]  127.19,78.36 0 top
LOGO139  OSHW-LOGOMINI  [OSHW-LOGO-MINI]  150.18,78.23 0 top
LOGO140  SFE_LOGO_NAME_FLAME.1_INCH  [SFE_LOGO_NAME_FLAME_.1]  145.29,87.12 0 bottom
LOGO141  SFE_LOGO_FLAME.1_INCH  [SFE_LOGO_FLAME_.1]  140.4,78.36 0 top
LOGO142  OSHW-LOGOMINI  [OSHW-LOGO-MINI]  163.39,78.23 0 top
LOGO143  SFE_LOGO_NAME_FLAME.1_INCH  [SFE_LOGO_NAME_FLAME_.1]  158.5,87.12 0 bottom
LOGO144  SFE_LOGO_FLAME.1_INCH  [SFE_LOGO_FLAME_.1]  153.61,78.36 0 top
LOGO145  OSHW-LOGOMINI  [OSHW-LOGO-MINI]  18.1,100.33 0 top
LOGO146  SFE_LOGO_NAME_FLAME.1_INCH  [SFE_LOGO_NAME_FLAME_.1]  13.21,109.22 0 bottom
LOGO147  SFE_LOGO_FLAME.1_INCH  [SFE_LOGO_FLAME_.1]  8.32,100.46 0 top
LOGO148  OSHW-LOGOMINI  [OSHW-LOGO-MINI]  31.31,100.33 0 top
LOGO149  SFE_LOGO_NAME_FLAME.1_INCH  [SFE_LOGO_NAME_FLAME_.1]  26.42,109.22 0 bottom
LOGO150  SFE_LOGO_FLAME.1_INCH  [SFE_LOGO_FLAME_.1]  21.53,100.46 0 top
LOGO151  OSHW-LOGOMINI  [OSHW-LOGO-MINI]  44.51,100.33 0 top
LOGO152  SFE_LOGO_NAME_FLAME.1_INCH  [SFE_LOGO_NAME_FLAME_.1]  39.62,109.22 0 bottom
LOGO153  SFE_LOGO_FLAME.1_INCH  [SFE_LOGO_FLAME_.1]  34.73,100.46 0 top
LOGO154  OSHW-LOGOMINI  [OSHW-LOGO-MINI]  57.72,100.33 0 top
LOGO155  SFE_LOGO_NAME_FLAME.1_INCH  [SFE_LOGO_NAME_FLAME_.1]  52.83,109.22 0 bottom
LOGO156  SFE_LOGO_FLAME.1_INCH  [SFE_LOGO_FLAME_.1]  47.94,100.46 0 top
LOGO157  OSHW-LOGOMINI  [OSHW-LOGO-MINI]  70.93,100.33 0 top
LOGO158  SFE_LOGO_NAME_FLAME.1_INCH  [SFE_LOGO_NAME_FLAME_.1]  66.04,109.22 0 bottom
LOGO159  SFE_LOGO_FLAME.1_INCH  [SFE_LOGO_FLAME_.1]  61.15,100.46 0 top
LOGO160  OSHW-LOGOMINI  [OSHW-LOGO-MINI]  84.14,100.33 0 top
LOGO161  SFE_LOGO_NAME_FLAME.1_INCH  [SFE_LOGO_NAME_FLAME_.1]  79.25,109.22 0 bottom
LOGO162  SFE_LOGO_FLAME.1_INCH  [SFE_LOGO_FLAME_.1]  74.36,100.46 0 top
LOGO163  OSHW-LOGOMINI  [OSHW-LOGO-MINI]  97.35,100.33 0 top
LOGO164  SFE_LOGO_NAME_FLAME.1_INCH  [SFE_LOGO_NAME_FLAME_.1]  92.46,109.22 0 bottom
LOGO165  SFE_LOGO_FLAME.1_INCH  [SFE_LOGO_FLAME_.1]  87.57,100.46 0 top
LOGO166  OSHW-LOGOMINI  [OSHW-LOGO-MINI]  110.55,100.33 0 top
LOGO167  SFE_LOGO_NAME_FLAME.1_INCH  [SFE_LOGO_NAME_FLAME_.1]  105.66,109.22 0 bottom
LOGO168  SFE_LOGO_FLAME.1_INCH  [SFE_LOGO_FLAME_.1]  100.77,100.46 0 top
LOGO169  OSHW-LOGOMINI  [OSHW-LOGO-MINI]  123.76,100.33 0 top
LOGO170  SFE_LOGO_NAME_FLAME.1_INCH  [SFE_LOGO_NAME_FLAME_.1]  118.87,109.22 0 bottom
LOGO171  SFE_LOGO_FLAME.1_INCH  [SFE_LOGO_FLAME_.1]  113.98,100.46 0 top
LOGO172  OSHW-LOGOMINI  [OSHW-LOGO-MINI]  136.97,100.33 0 top
LOGO173  SFE_LOGO_NAME_FLAME.1_INCH  [SFE_LOGO_NAME_FLAME_.1]  132.08,109.22 0 bottom
LOGO174  SFE_LOGO_FLAME.1_INCH  [SFE_LOGO_FLAME_.1]  127.19,100.46 0 top
LOGO175  OSHW-LOGOMINI  [OSHW-LOGO-MINI]  150.18,100.33 0 top
LOGO176  SFE_LOGO_NAME_FLAME.1_INCH  [SFE_LOGO_NAME_FLAME_.1]  145.29,109.22 0 bottom
LOGO177  SFE_LOGO_FLAME.1_INCH  [SFE_LOGO_FLAME_.1]  140.4,100.46 0 top
LOGO178  OSHW-LOGOMINI  [OSHW-LOGO-MINI]  163.39,100.33 0 top
LOGO179  SFE_LOGO_NAME_FLAME.1_INCH  [SFE_LOGO_NAME_FLAME_.1]  158.5,109.22 0 bottom
LOGO180  SFE_LOGO_FLAME.1_INCH  [SFE_LOGO_FLAME_.1]  153.61,100.46 0 top
R1  47k  [0603]  22.61,10.16 0 top
R2  47k  [0603]  35.81,10.16 0 top
R3  47k  [0603]  49.02,10.16 0 top
R4  47k  [0603]  62.23,10.16 0 top
R5  47k  [0603]  9.4,10.16 0 top
R6  47k  [0603]  75.44,10.16 0 top
R7  47k  [0603]  88.65,10.16 0 top
R8  47k  [0603]  101.85,10.16 0 top
R9  47k  [0603]  115.06,10.16 0 top
R10  47k  [0603]  128.27,10.16 0 top
R11  47k  [0603]  141.48,10.16 0 top
R12  47k  [0603]  154.69,10.16 0 top
R13  47k  [0603]  9.4,32.26 0 top
R14  47k  [0603]  22.61,32.26 0 top
R15  47k  [0603]  35.81,32.26 0 top
R16  47k  [0603]  49.02,32.26 0 top
R17  47k  [0603]  62.23,32.26 0 top
R18  47k  [0603]  75.44,32.26 0 top
R19  47k  [0603]  88.65,32.26 0 top
R20  47k  [0603]  101.85,32.26 0 top
R21  47k  [0603]  115.06,32.26 0 top
R22  47k  [0603]  128.27,32.26 0 top
R23  47k  [0603]  141.48,32.26 0 top
R24  47k  [0603]  154.69,32.26 0 top
R25  47k  [0603]  9.4,54.36 0 top
R26  47k  [0603]  22.61,54.36 0 top
R27  47k  [0603]  35.81,54.36 0 top
R28  47k  [0603]  49.02,54.36 0 top
R29  47k  [0603]  62.23,54.36 0 top
R30  47k  [0603]  75.44,54.36 0 top
R31  47k  [0603]  88.65,54.36 0 top
R32  47k  [0603]  101.85,54.36 0 top
R33  47k  [0603]  115.06,54.36 0 top
R34  47k  [0603]  128.27,54.36 0 top
R35  47k  [0603]  141.48,54.36 0 top
R36  47k  [0603]  154.69,54.36 0 top
R37  47k  [0603]  9.4,76.45 0 top
R38  47k  [0603]  22.61,76.45 0 top
R39  47k  [0603]  35.81,76.45 0 top
R40  47k  [0603]  49.02,76.45 0 top
R41  47k  [0603]  62.23,76.45 0 top
R42  47k  [0603]  75.44,76.45 0 top
R43  47k  [0603]  88.65,76.45 0 top
R44  47k  [0603]  101.85,76.45 0 top
R45  47k  [0603]  115.06,76.45 0 top
R46  47k  [0603]  128.27,76.45 0 top
R47  47k  [0603]  141.48,76.45 0 top
R48  47k  [0603]  154.69,76.45 0 top
R49  47k  [0603]  9.4,98.55 0 top
R50  47k  [0603]  22.61,98.55 0 top
R51  47k  [0603]  35.81,98.55 0 top
R52  47k  [0603]  49.02,98.55 0 top
R53  47k  [0603]  62.23,98.55 0 top
R54  47k  [0603]  75.44,98.55 0 top
R55  47k  [0603]  88.65,98.55 0 top
R56  47k  [0603]  101.85,98.55 0 top
R57  47k  [0603]  115.06,98.55 0 top
R58  47k  [0603]  128.27,98.55 0 top
R59  47k  [0603]  141.48,98.55 0 top
R60  47k  [0603]  154.69,98.55 0 top
U1  EKMC4607112k  [TO-3]  13.21,17.02 0 top
U2  EKMC4607112k  [TO-3]  26.42,17.02 0 top
U3  EKMC4607112k  [TO-3]  39.62,17.02 0 top
U4  EKMC4607112k  [TO-3]  52.83,17.02 0 top
U5  EKMC4607112k  [TO-3]  66.04,17.02 0 top
U6  EKMC4607112k  [TO-3]  79.25,17.02 0 top
U7  EKMC4607112k  [TO-3]  92.46,17.02 0 top
U8  EKMC4607112k  [TO-3]  105.66,17.02 0 top
U9  EKMC4607112k  [TO-3]  118.87,17.02 0 top
U10  EKMC4607112k  [TO-3]  132.08,17.02 0 top
U11  EKMC4607112k  [TO-3]  145.29,17.02 0 top
U12  EKMC4607112k  [TO-3]  158.5,17.02 0 top
U13  EKMC4607112k  [TO-3]  13.21,39.12 0 top
U14  EKMC4607112k  [TO-3]  26.42,39.12 0 top
U15  EKMC4607112k  [TO-3]  39.62,39.12 0 top
U16  EKMC4607112k  [TO-3]  52.83,39.12 0 top
U17  EKMC4607112k  [TO-3]  66.04,39.12 0 top
U18  EKMC4607112k  [TO-3]  79.25,39.12 0 top
U19  EKMC4607112k  [TO-3]  92.46,39.12 0 top
U20  EKMC4607112k  [TO-3]  105.66,39.12 0 top
U21  EKMC4607112k  [TO-3]  118.87,39.12 0 top
U22  EKMC4607112k  [TO-3]  132.08,39.12 0 top
U23  EKMC4607112k  [TO-3]  145.29,39.12 0 top
U24  EKMC4607112k  [TO-3]  158.5,39.12 0 top
U25  EKMC4607112k  [TO-3]  13.21,61.21 0 top
U26  EKMC4607112k  [TO-3]  26.42,61.21 0 top
U27  EKMC4607112k  [TO-3]  39.62,61.21 0 top
U28  EKMC4607112k  [TO-3]  52.83,61.21 0 top
U29  EKMC4607112k  [TO-3]  66.04,61.21 0 top
U30  EKMC4607112k  [TO-3]  79.25,61.21 0 top
U31  EKMC4607112k  [TO-3]  92.46,61.21 0 top
U32  EKMC4607112k  [TO-3]  105.66,61.21 0 top
U33  EKMC4607112k  [TO-3]  118.87,61.21 0 top
U34  EKMC4607112k  [TO-3]  132.08,61.21 0 top
U35  EKMC4607112k  [TO-3]  145.29,61.21 0 top
U36  EKMC4607112k  [TO-3]  158.5,61.21 0 top
U37  EKMC4607112k  [TO-3]  13.21,83.31 0 top
U38  EKMC4607112k  [TO-3]  26.42,83.31 0 top
U39  EKMC4607112k  [TO-3]  39.62,83.31 0 top
U40  EKMC4607112k  [TO-3]  52.83,83.31 0 top
U41  EKMC4607112k  [TO-3]  66.04,83.31 0 top
U42  EKMC4607112k  [TO-3]  79.25,83.31 0 top
U43  EKMC4607112k  [TO-3]  92.46,83.31 0 top
U44  EKMC4607112k  [TO-3]  105.66,83.31 0 top
U45  EKMC4607112k  [TO-3]  118.87,83.31 0 top
U46  EKMC4607112k  [TO-3]  132.08,83.31 0 top
U47  EKMC4607112k  [TO-3]  145.29,83.31 0 top
U48  EKMC4607112k  [TO-3]  158.5,83.31 0 top
U49  EKMC4607112k  [TO-3]  13.21,105.41 0 top
U50  EKMC4607112k  [TO-3]  26.42,105.41 0 top
U51  EKMC4607112k  [TO-3]  39.62,105.41 0 top
U52  EKMC4607112k  [TO-3]  52.83,105.41 0 top
U53  EKMC4607112k  [TO-3]  66.04,105.41 0 top
U54  EKMC4607112k  [TO-3]  79.25,105.41 0 top
U55  EKMC4607112k  [TO-3]  92.46,105.41 0 top
U56  EKMC4607112k  [TO-3]  105.66,105.41 0 top
U57  EKMC4607112k  [TO-3]  118.87,105.41 0 top
U58  EKMC4607112k  [TO-3]  132.08,105.41 0 top
U59  EKMC4607112k  [TO-3]  145.29,105.41 0 top
U60  EKMC4607112k  [TO-3]  158.5,105.41 0 top
U$1  [#3V3#0]  15.75,8.64 90 bottom
U$2  [170UA0]  8.13,22.73 90 top
U$3  [#GND#0]  10.67,8.64 90 bottom
U$4  [PIR0]  28.13,17.84 0 bottom
U$5  [170UA0]  21.34,22.73 90 top
U$6  [1UA0]  31.5,22.73 90 top
U$7  [BREAKOUT0]  30.54,16.64 0 bottom
U$8  [#OUT#0]  26.42,8.57 90 bottom
U$9  [1UA0]  18.29,22.73 90 top
U$10  [#3V3#0]  28.96,8.64 90 bottom
U$11  [#OUT#0]  13.21,8.57 90 bottom
U$12  [BREAKOUT0]  17.34,16.64 0 bottom
U$13  [PIR0]  14.92,17.84 0 bottom
U$14  [X0]  19.05,16.89 0 bottom
U$15  [#GND#0]  23.88,8.64 90 bottom
U$16  [Y0]  18.29,15.75 0 bottom
U$17  [X0]  32.26,16.89 0 bottom
U$18  [Y0]  31.5,15.75 0 bottom
U$19  [PIR0]  41.34,17.84 0 bottom
U$20  [170UA0]  34.54,22.73 90 top
U$21  [1UA0]  44.7,22.73 90 top
U$22  [BREAKOUT0]  43.75,16.64 0 bottom
U$23  [#OUT#0]  39.62,8.57 90 bottom
U$24  [#3V3#0]  42.16,8.64 90 bottom
U$25  [#GND#0]  37.08,8.64 90 bottom
U$26  [X0]  45.47,16.89 0 bottom
U$27  [Y0]  44.7,15.75 0 bottom
U$28  [PIR0]  54.55,17.84 0 bottom
U$29  [170UA0]  47.75,22.73 90 top
U$30  [1UA0]  57.91,22.73 90 top
U$31  [BREAKOUT0]  56.96,16.64 0 bottom
U$32  [#OUT#0]  52.83,8.57 90 bottom
U$33  [#3V3#0]  55.37,8.64 90 bottom
U$34  [#GND#0]  50.29,8.64 90 bottom
U$35  [X0]  58.67,16.89 0 bottom
U$36  [Y0]  57.91,15.75 0 bottom
U$37  [PIR0]  67.75,17.84 0 bottom
U$38  [170UA0]  60.96,22.73 90 top
U$39  [1UA0]  71.12,22.73 90 top
U$40  [BREAKOUT0]  70.17,16.64 0 bottom
U$41  [#OUT#0]  66.04,8.57 90 bottom
U$42  [#3V3#0]  68.58,8.64 90 bottom
U$43  [#GND#0]  63.5,8.64 90 bottom
U$44  [X0]  71.88,16.89 0 bottom
U$45  [Y0]  71.12,15.75 0 bottom
U$46  [PIR0]  80.96,17.84 0 bottom
U$47  [170UA0]  74.17,22.73 90 top
U$48  [1UA0]  84.33,22.73 90 top
U$49  [BREAKOUT0]  83.38,16.64 0 bottom
U$50  [#OUT#0]  79.25,8.57 90 bottom
U$51  [#3V3#0]  81.79,8.64 90 bottom
U$52  [#GND#0]  76.71,8.64 90 bottom
U$53  [X0]  85.09,16.89 0 bottom
U$54  [Y0]  84.33,15.75 0 bottom
U$55  [PIR0]  94.17,17.84 0 bottom
U$56  [170UA0]  87.38,22.73 90 top
U$57  [1UA0]  97.54,22.73 90 top
U$58  [BREAKOUT0]  96.58,16.64 0 bottom
U$59  [#OUT#0]  92.46,8.57 90 bottom
U$60  [#3V3#0]  95,8.64 90 bottom
U$61  [#GND#0]  89.92,8.64 90 bottom
U$62  [X0]  98.3,16.89 0 bottom
U$63  [Y0]  97.54,15.75 0 bottom
U$64  [PIR0]  107.38,17.84 0 bottom
U$65  [170UA0]  100.58,22.73 90 top
U$66  [1UA0]  110.74,22.73 90 top
U$67  [BREAKOUT0]  109.79,16.64 0 bottom
U$68  [#OUT#0]  105.66,8.57 90 bottom
U$69  [#3V3#0]  108.2,8.64 90 bottom
U$70  [#GND#0]  103.12,8.64 90 bottom
U$71  [X0]  111.51,16.89 0 bottom
U$72  [Y0]  110.74,15.75 0 bottom
U$73  [PIR0]  120.59,17.84 0 bottom
U$74  [170UA0]  113.79,22.73 90 top
U$75  [1UA0]  123.95,22.73 90 top
U$76  [BREAKOUT0]  123,16.64 0 bottom
U$77  [#OUT#0]  118.87,8.57 90 bottom
U$78  [#3V3#0]  121.41,8.64 90 bottom
U$79  [#GND#0]  116.33,8.64 90 bottom
U$80  [X0]  124.71,16.89 0 bottom
U$81  [Y0]  123.95,15.75 0 bottom
U$82  [PIR0]  133.79,17.84 0 bottom
U$83  [170UA0]  127,22.73 90 top
U$84  [1UA0]  137.16,22.73 90 top
U$85  [BREAKOUT0]  136.21,16.64 0 bottom
U$86  [#OUT#0]  132.08,8.57 90 bottom
U$87  [#3V3#0]  134.62,8.64 90 bottom
U$88  [#GND#0]  129.54,8.64 90 bottom
U$89  [X0]  137.92,16.89 0 bottom
U$90  [Y0]  137.16,15.75 0 bottom
U$91  [PIR0]  147,17.84 0 bottom
U$92  [170UA0]  140.21,22.73 90 top
U$93  [1UA0]  150.37,22.73 90 top
U$94  [BREAKOUT0]  149.42,16.64 0 bottom
U$95  [#OUT#0]  145.29,8.57 90 bottom
U$96  [#3V3#0]  147.83,8.64 90 bottom
U$97  [#GND#0]  142.75,8.64 90 bottom
U$98  [X0]  151.13,16.89 0 bottom
U$99  [Y0]  150.37,15.75 0 bottom
U$100  [PIR0]  160.21,17.84 0 bottom
U$101  [170UA0]  153.42,22.73 90 top
U$102  [1UA0]  163.58,22.73 90 top
U$103  [BREAKOUT0]  162.62,16.64 0 bottom
U$104  [#OUT#0]  158.5,8.57 90 bottom
U$105  [#3V3#0]  161.04,8.64 90 bottom
U$106  [#GND#0]  155.96,8.64 90 bottom
U$107  [X0]  164.34,16.89 0 bottom
U$108  [Y0]  163.58,15.75 0 bottom
U$109  [PIR0]  14.92,39.94 0 bottom
U$110  [170UA0]  8.13,44.83 90 top
U$111  [1UA0]  18.29,44.83 90 top
U$112  [BREAKOUT0]  17.34,38.73 0 bottom
U$113  [#OUT#0]  13.21,30.67 90 bottom
U$114  [#3V3#0]  15.75,30.73 90 bottom
U$115  [#GND#0]  10.67,30.73 90 bottom
U$116  [X0]  19.05,38.99 0 bottom
U$117  [Y0]  18.29,37.85 0 bottom
U$118  [PIR0]  28.13,39.94 0 bottom
U$119  [170UA0]  21.34,44.83 90 top
U$120  [1UA0]  31.5,44.83 90 top
U$121  [BREAKOUT0]  30.54,38.73 0 bottom
U$122  [#OUT#0]  26.42,30.67 90 bottom
U$123  [#3V3#0]  28.96,30.73 90 bottom
U$124  [#GND#0]  23.88,30.73 90 bottom
U$125  [X0]  32.26,38.99 0 bottom
U$126  [Y0]  31.5,37.85 0 bottom
U$127  [PIR0]  41.34,39.94 0 bottom
U$128  [170UA0]  34.54,44.83 90 top
U$129  [1UA0]  44.7,44.83 90 top
U$130  [BREAKOUT0]  43.75,38.73 0 bottom
U$131  [#OUT#0]  39.62,30.67 90 bottom
U$132  [#3V3#0]  42.16,30.73 90 bottom
U$133  [#GND#0]  37.08,30.73 90 bottom
U$134  [X0]  45.47,38.99 0 bottom
U$135  [Y0]  44.7,37.85 0 bottom
U$136  [PIR0]  54.55,39.94 0 bottom
U$137  [170UA0]  47.75,44.83 90 top
U$138  [1UA0]  57.91,44.83 90 top
U$139  [BREAKOUT0]  56.96,38.73 0 bottom
U$140  [#OUT#0]  52.83,30.67 90 bottom
U$141  [#3V3#0]  55.37,30.73 90 bottom
U$142  [#GND#0]  50.29,30.73 90 bottom
U$143  [X0]  58.67,38.99 0 bottom
U$144  [Y0]  57.91,37.85 0 bottom
U$145  [PIR0]  67.75,39.94 0 bottom
U$146  [170UA0]  60.96,44.83 90 top
U$147  [1UA0]  71.12,44.83 90 top
U$148  [BREAKOUT0]  70.17,38.73 0 bottom
U$149  [#OUT#0]  66.04,30.67 90 bottom
U$150  [#3V3#0]  68.58,30.73 90 bottom
U$151  [#GND#0]  63.5,30.73 90 bottom
U$152  [X0]  71.88,38.99 0 bottom
U$153  [Y0]  71.12,37.85 0 bottom
U$154  [PIR0]  80.96,39.94 0 bottom